# Altium PCB MotorControllerPCB.PcbDoc
Units mm, origin at the board's own origin, x right, y up, seen from the top; angles counter-clockwise.
Board outline 50 x 50 mm, 4 copper layers (L1 [Signal], L2 [GND], L3 [GND], L4 [Signal]), stack 1.57 mm thick; 80 components, 55 nets, 328 pads, 241 vias.
Unrouted connection lines stored in the file: 177.
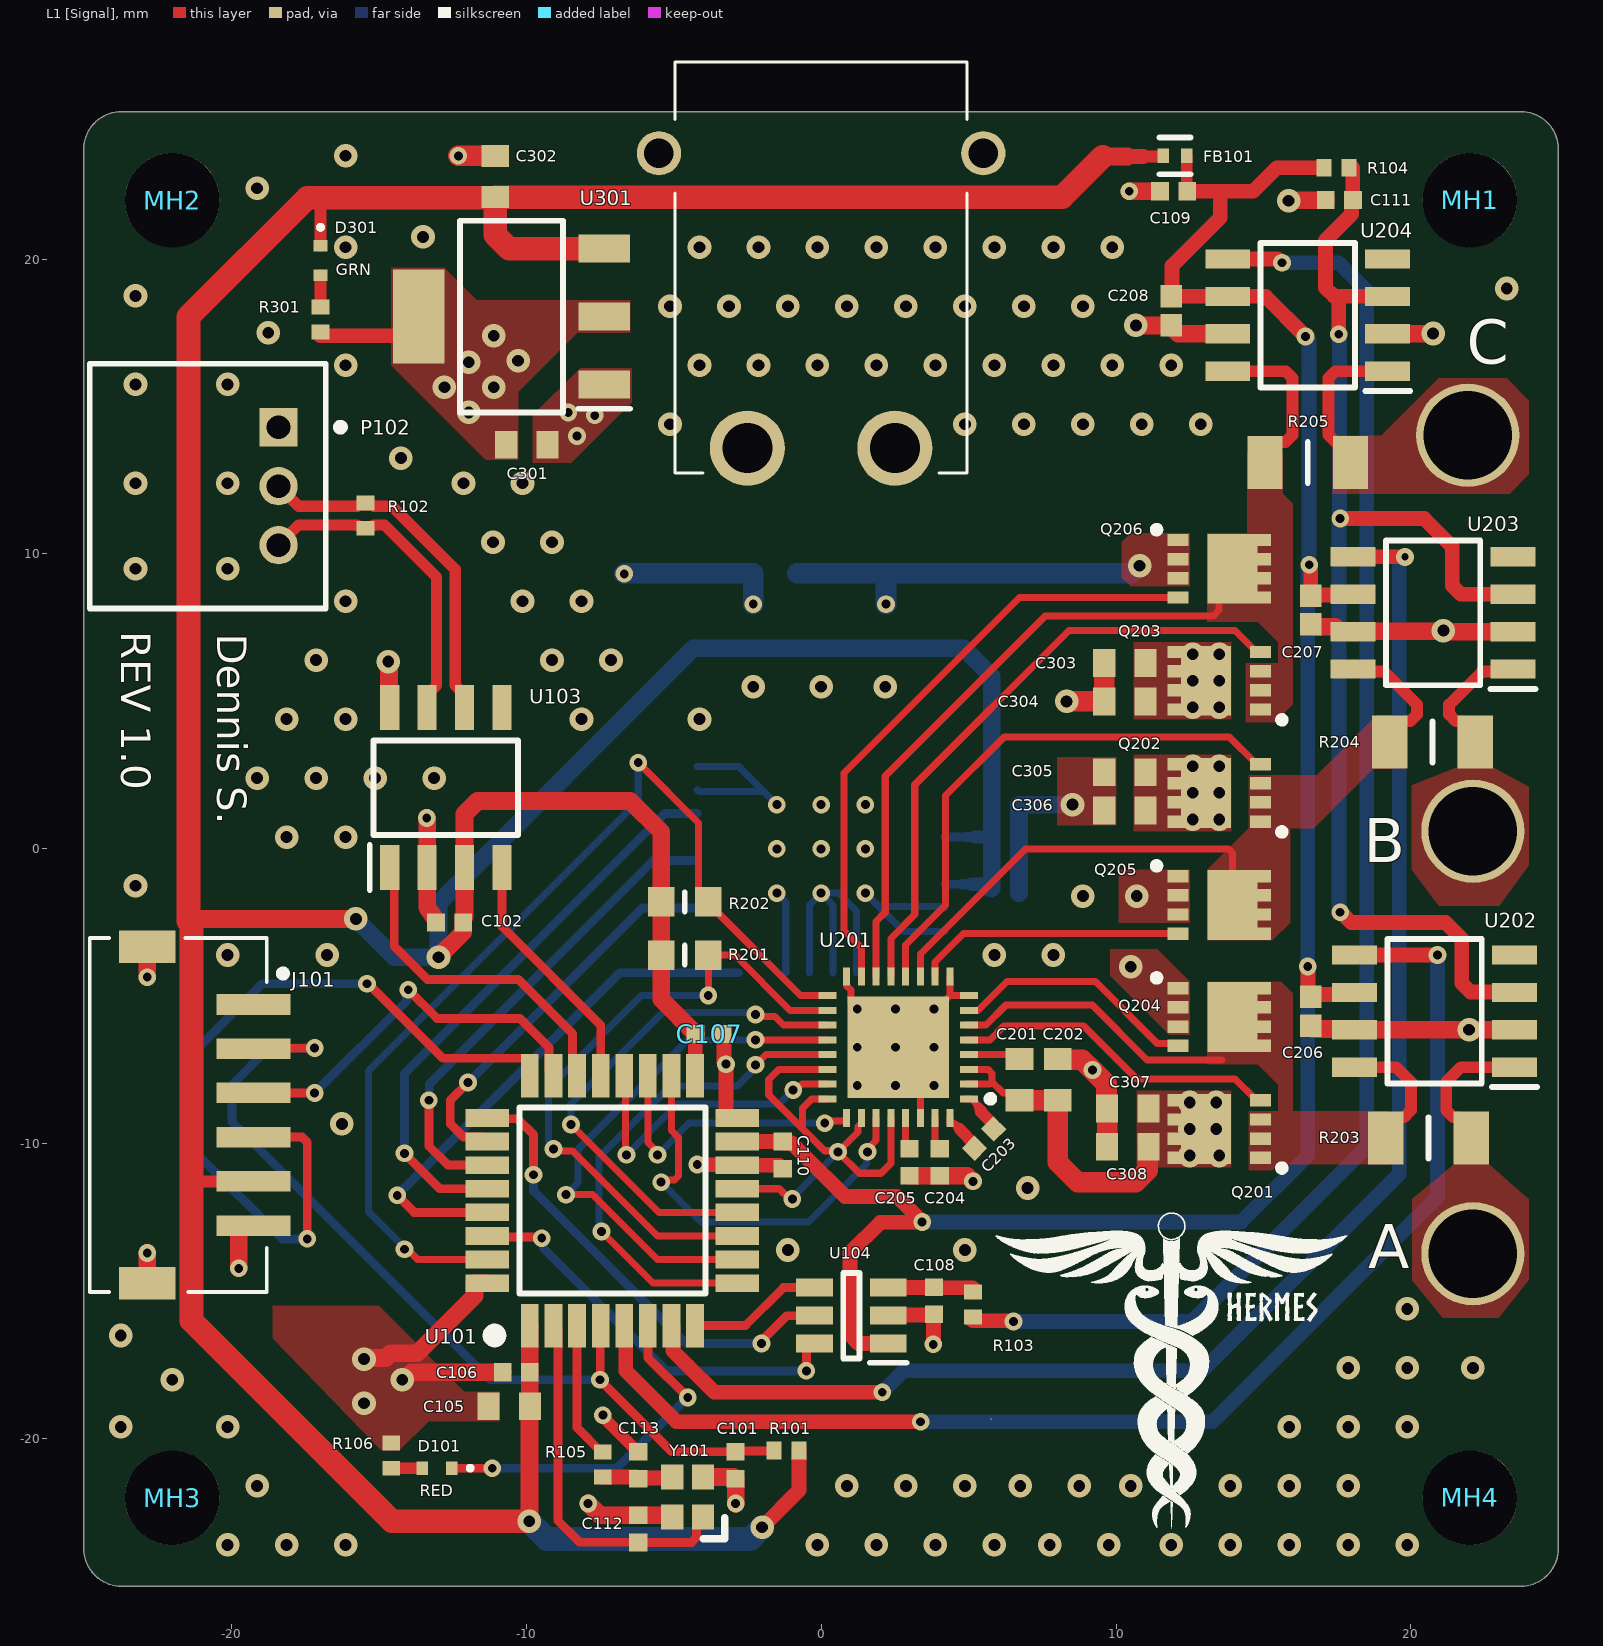
[diagram p0: L1 [Signal] view]
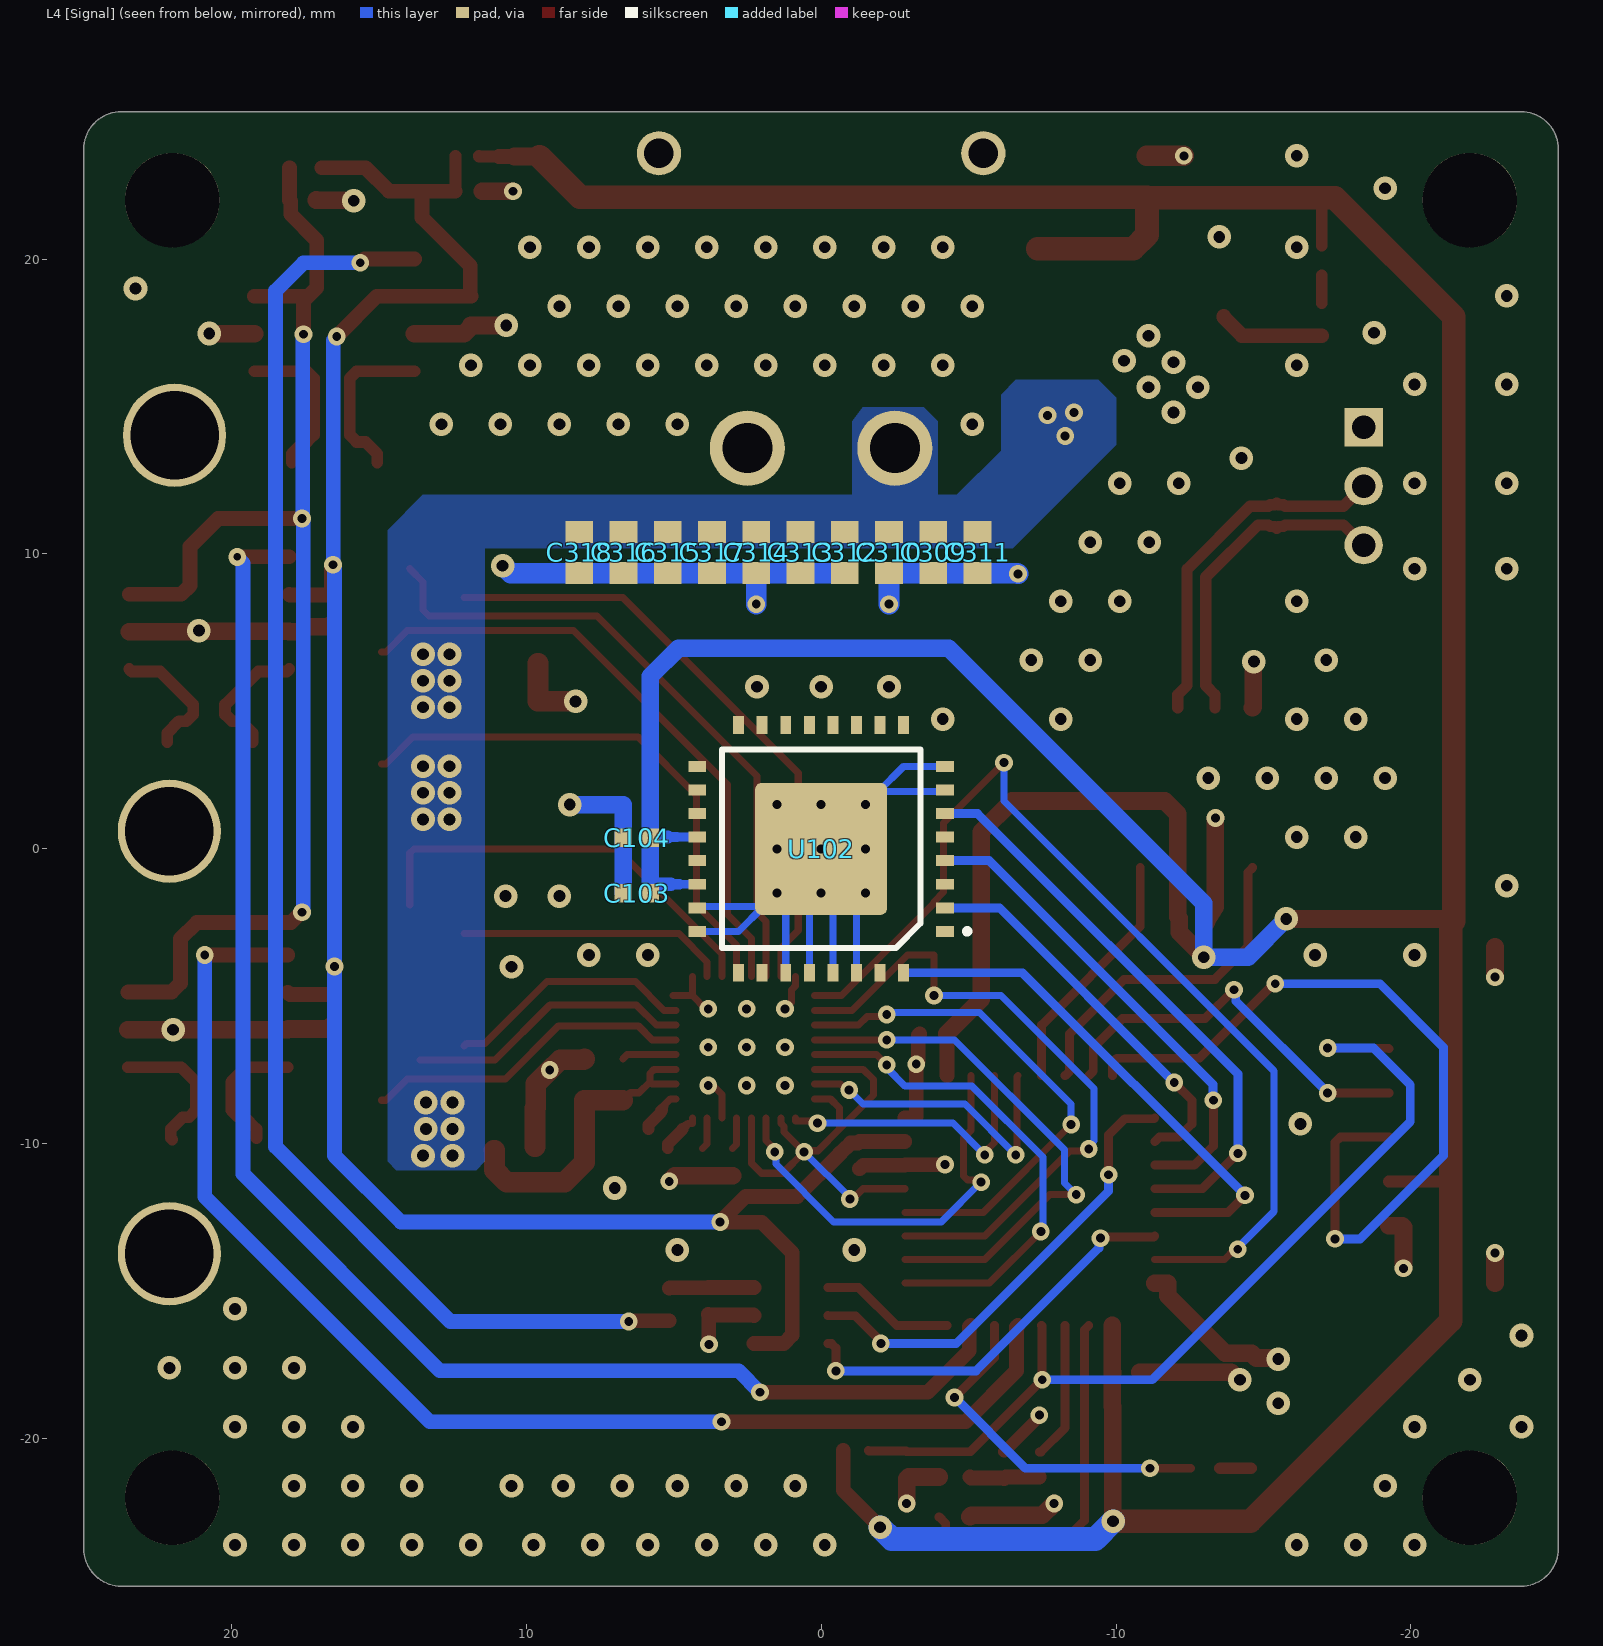
[diagram p1: L4 [Signal] view, seen from below]
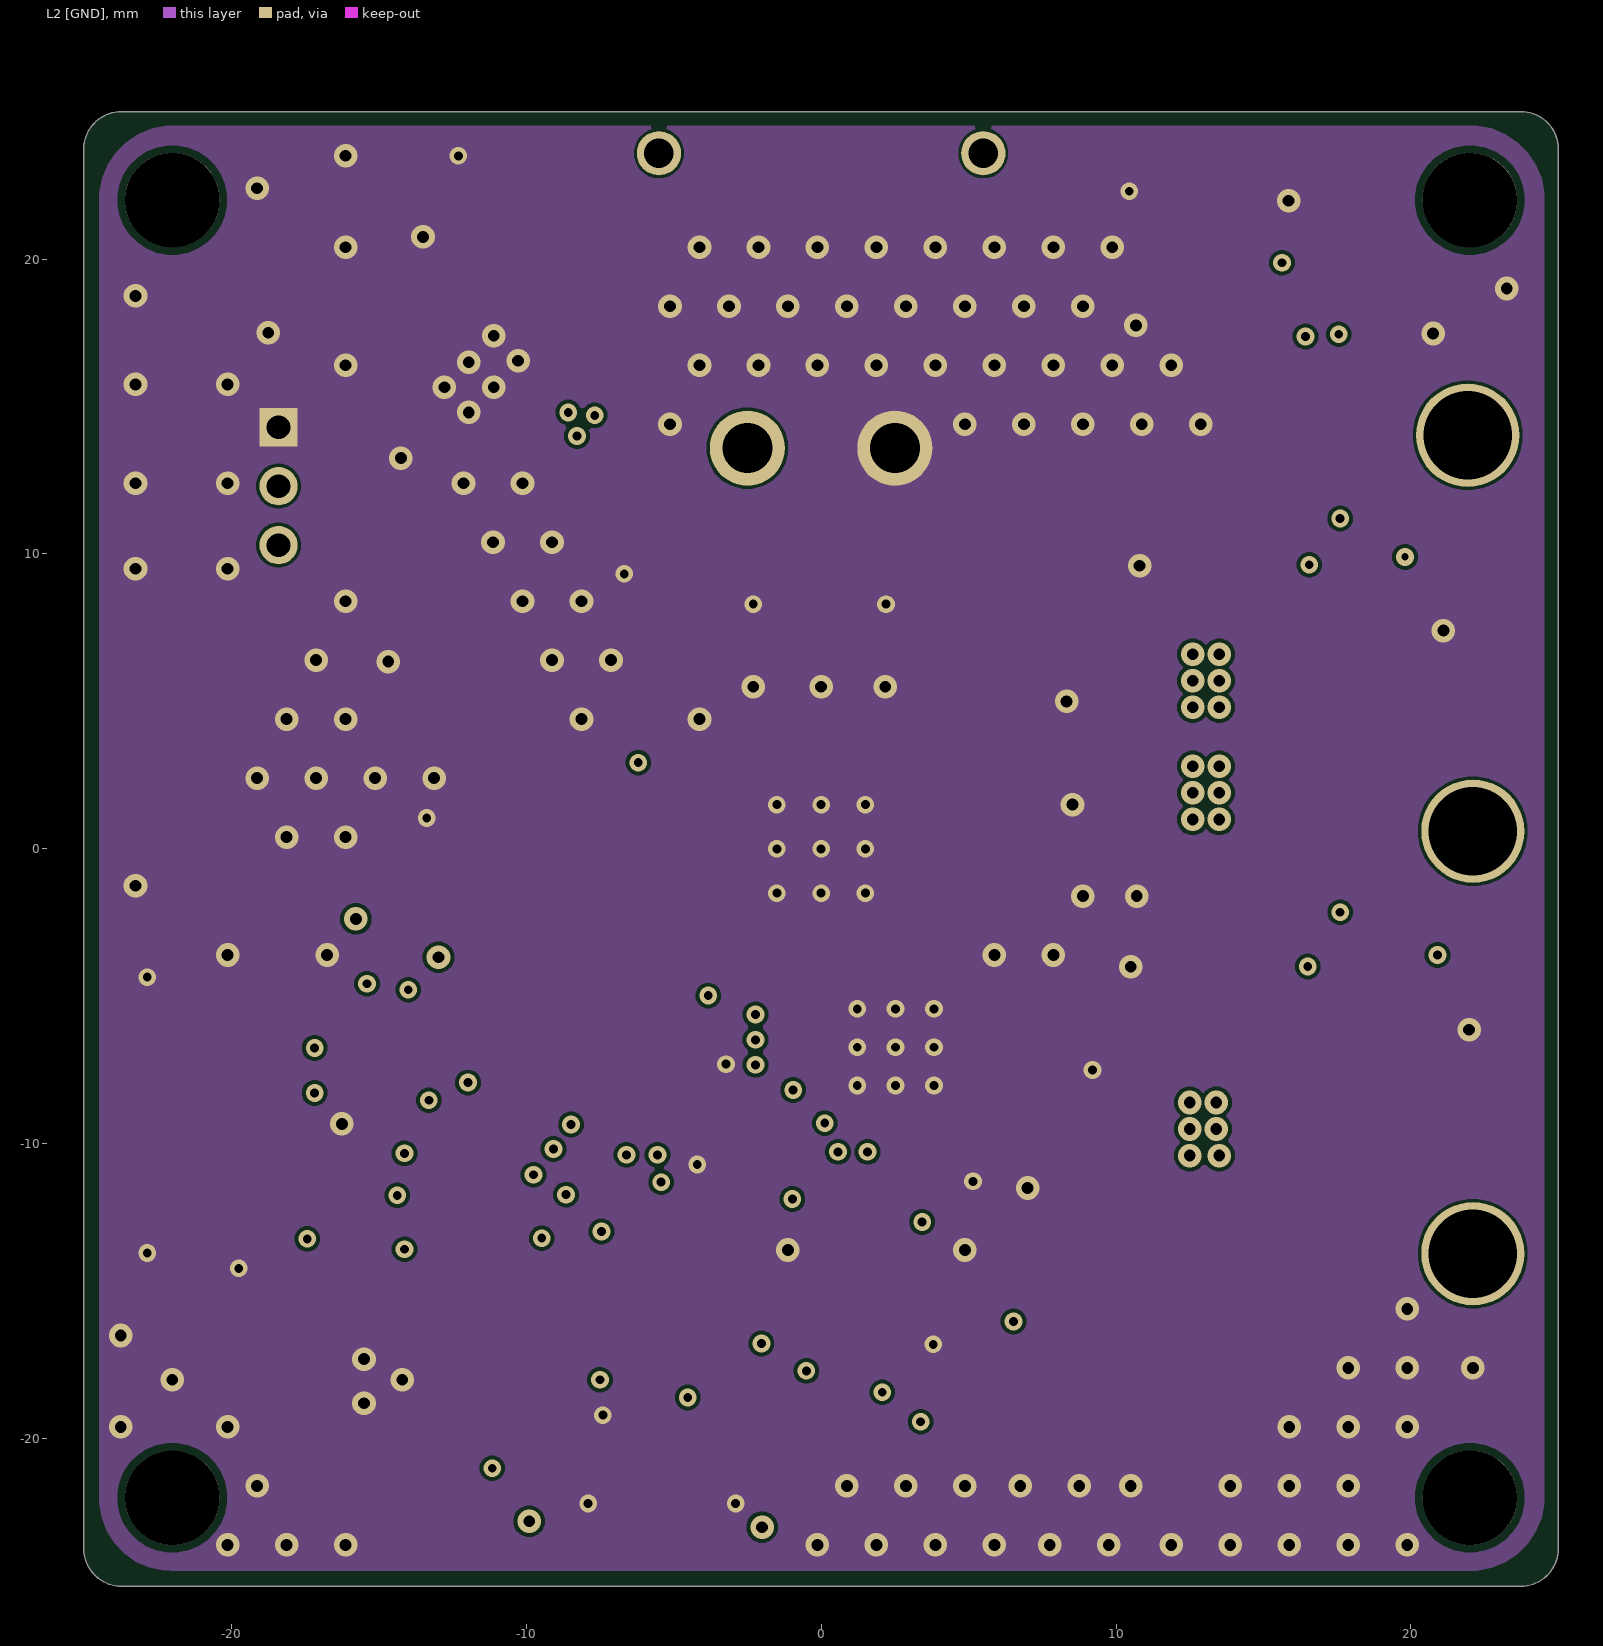
[diagram p2: L2 [GND]]
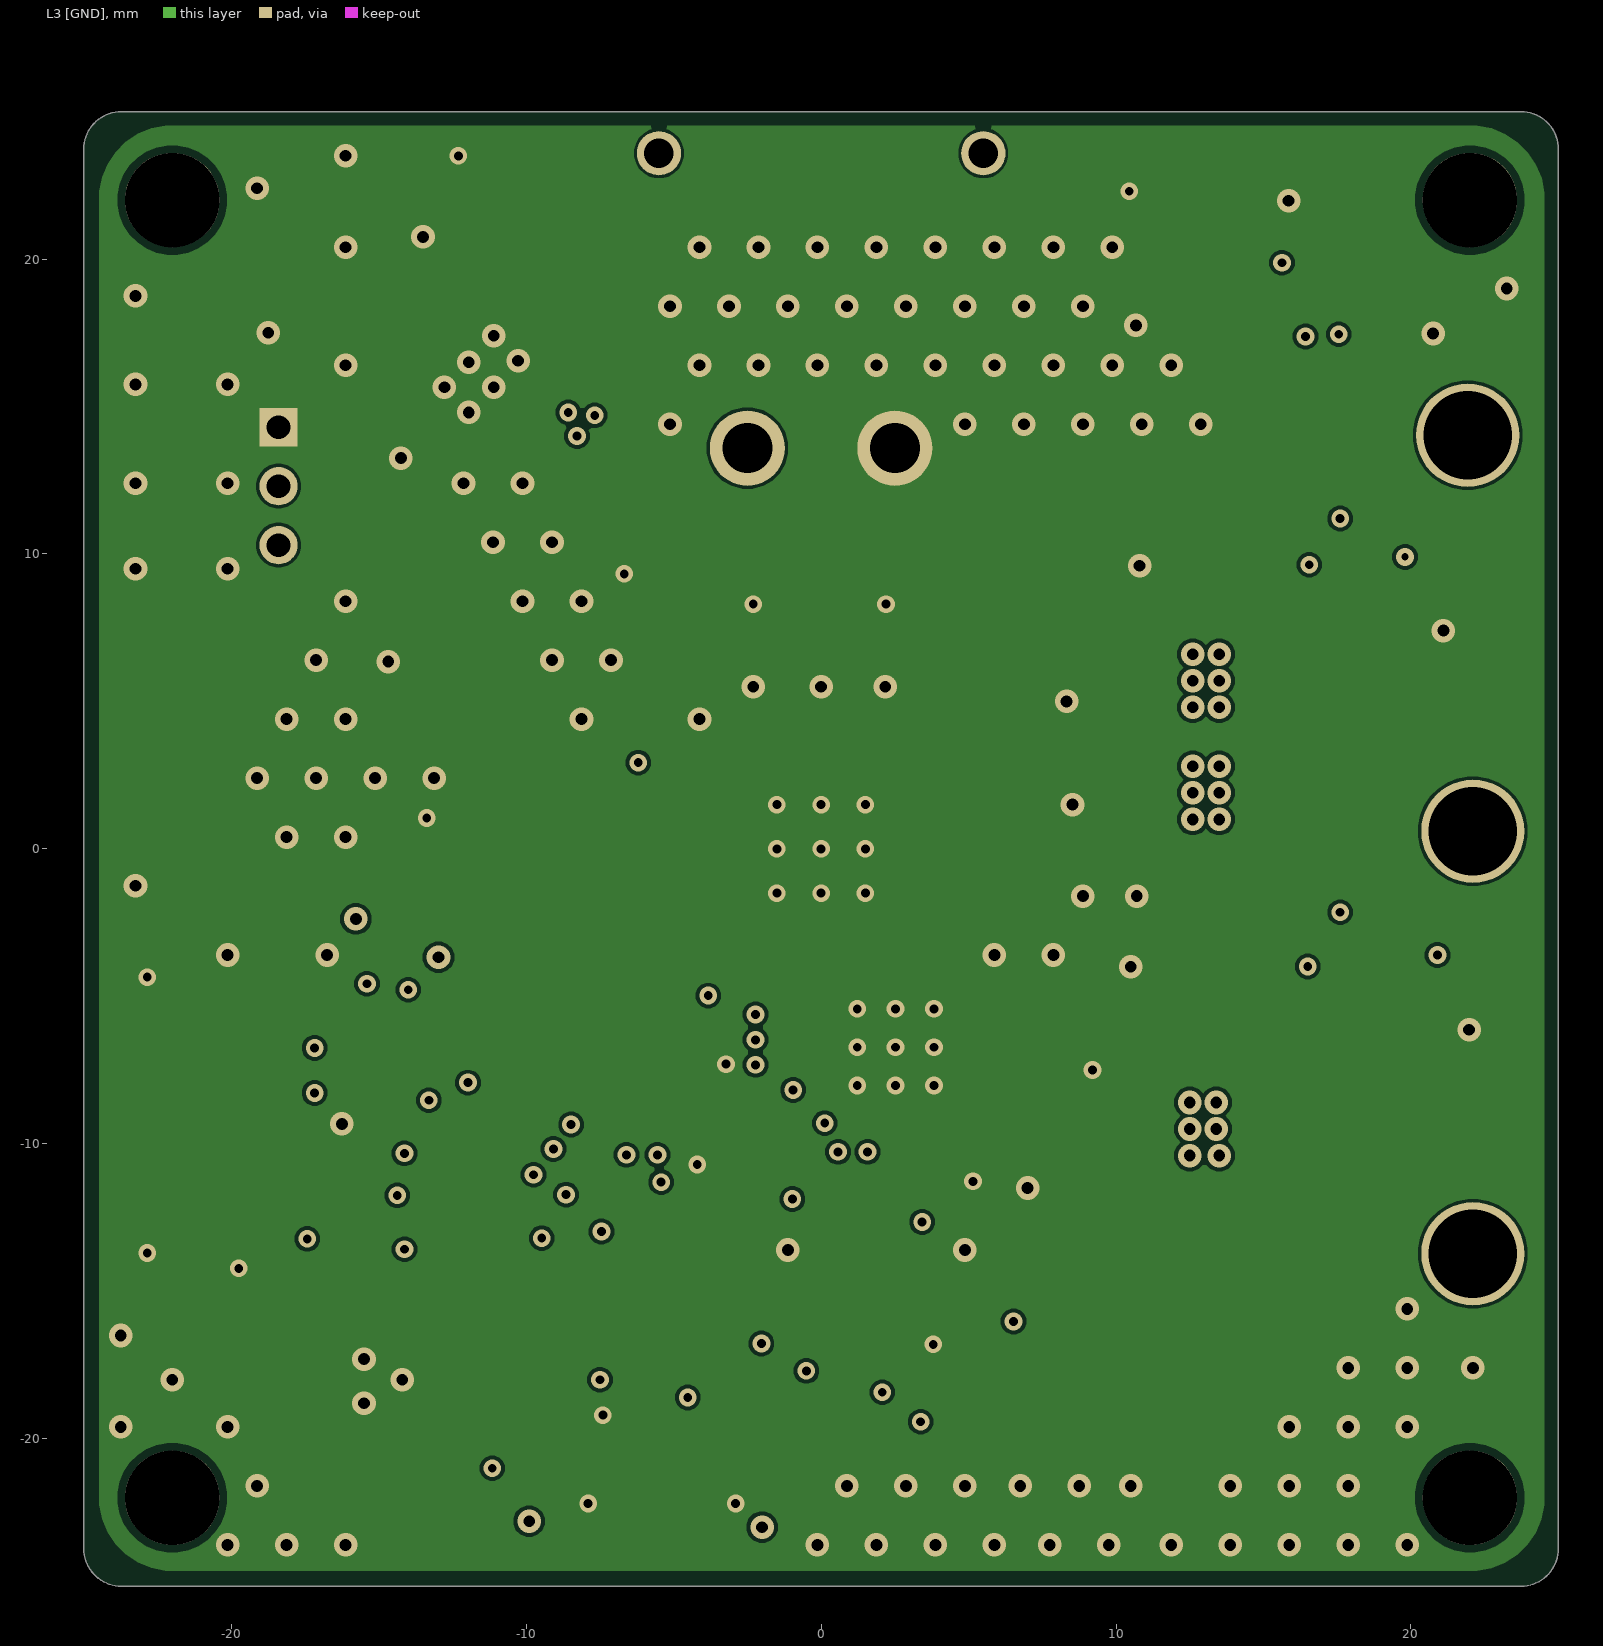
[diagram p3: L3 [GND]]
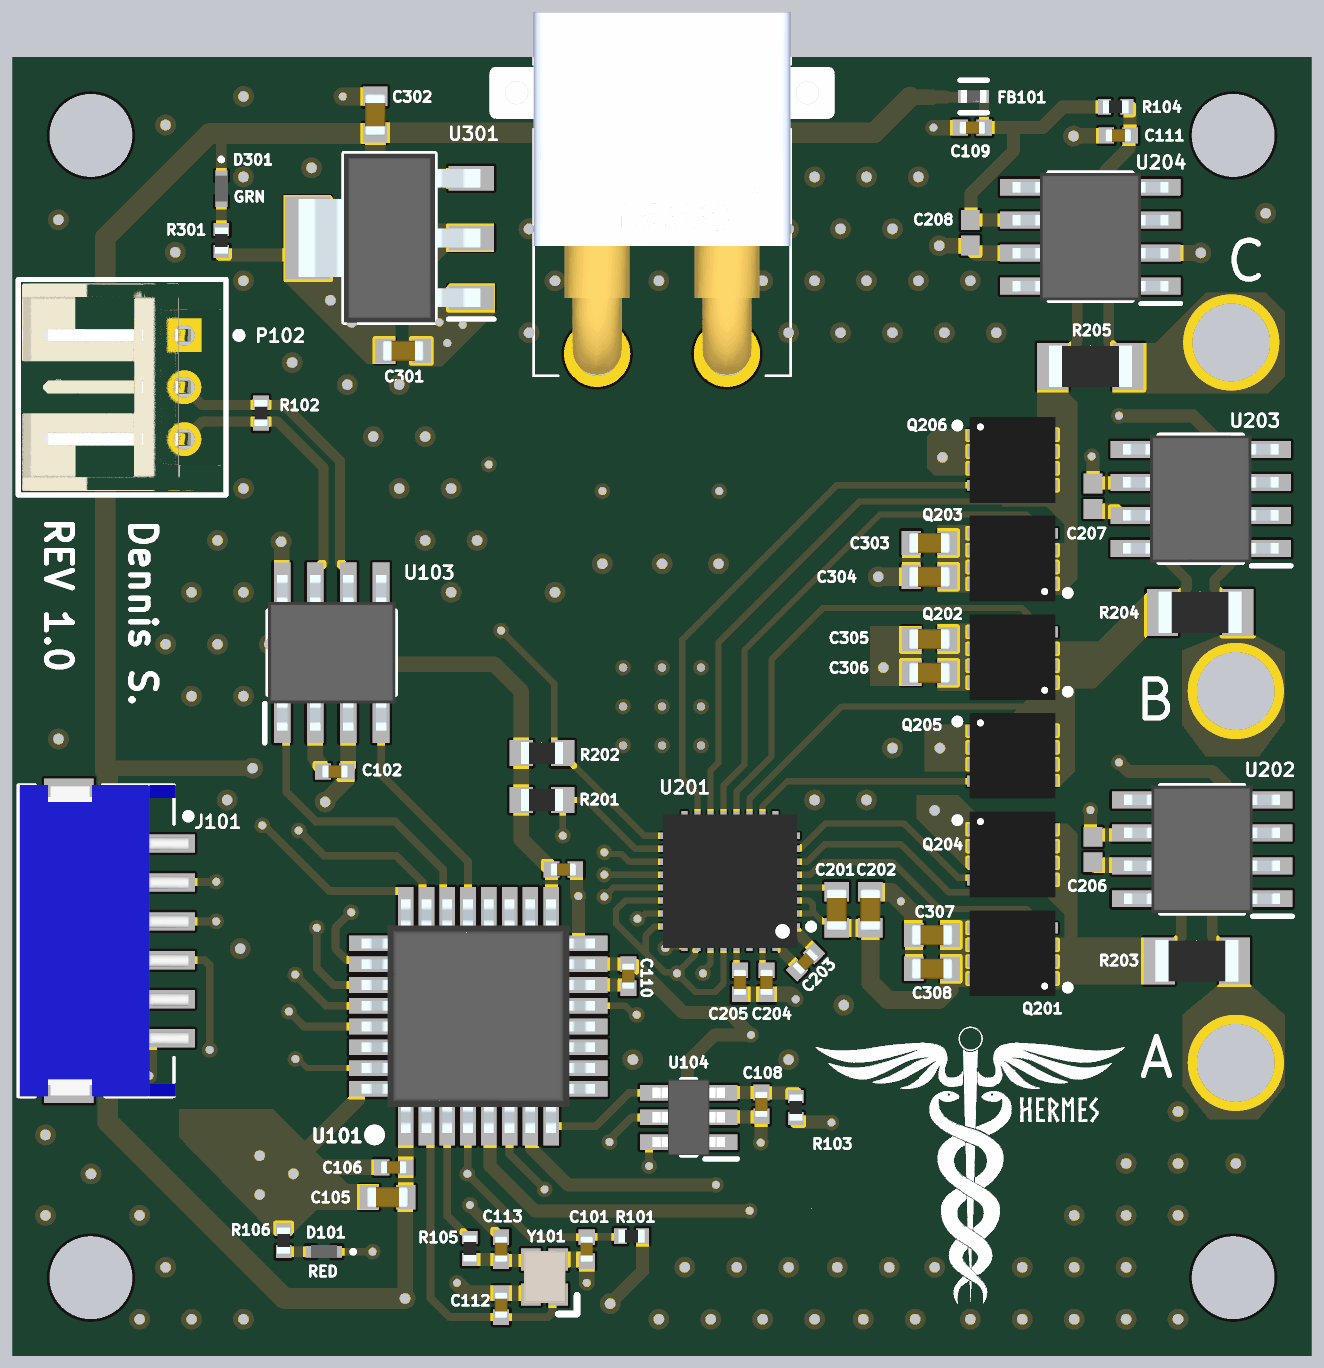
[diagram p4: 3D render of the assembled board from above, using the file's embedded part models]
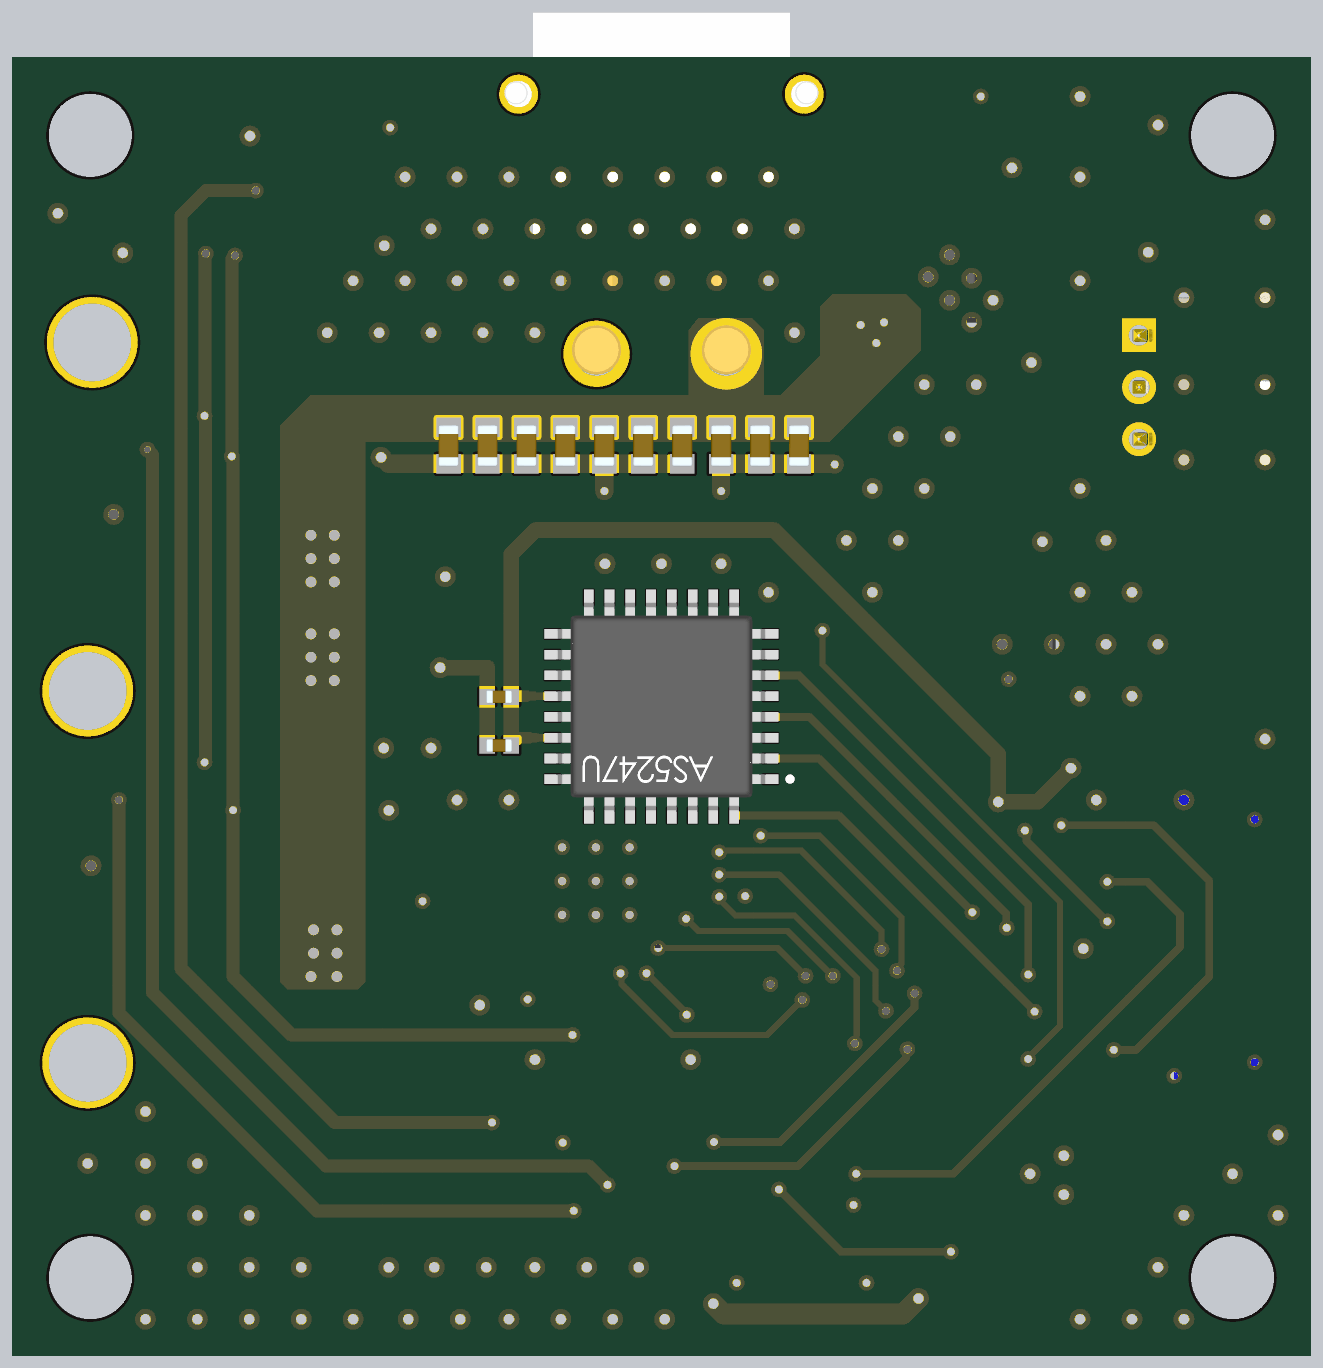
[diagram p5: 3D render of the assembled board from below, using the file's embedded part models]

## Layer stack, top to bottom
Top Solder: solder mask 0.0254, SM-001, Dk 4
L1 [Signal]: signal copper 0.035
Dielectric 1: prepreg 0.2, PP-017, Dk 4.6
L2 [GND]: signal copper 0.0175
Dielectric 3: core 1.065, Core-039, Dk 4.6
L3 [GND]: signal copper 0.0175
Dielectric 5: prepreg 0.2, PP-017, Dk 4.6
L4 [Signal]: signal copper 0.035
Bottom Solder: solder mask 0.0254, SM-001, Dk 4

## Board outline
-25,-23.73 ccw(c-23.73,-23.73) -23.73,-25 23.73,-25 ccw(c23.73,-23.73) 25,-23.73 25,23.73 ccw(c23.73,23.73) 23.73,25 -23.73,25 ccw(c-23.73,23.73) -25,23.73

## Design rules (kind name [scope] priority, off if disabled: settings)
Clearance [All] p1: gap=0.102 ignorepadtopadclearanceinfootprint=FALSE except(0.127: Arc-Via Track-Via SMDPad-Via THPad-Via Via-Via Via-Fill Via-Poly Via-Region Via-Text; 0.25: Arc-Hole Track-Hole SMDPad-Hole THPad-Hole Via-Hole Fill-Hole Poly-Hole Region-Hole Text-Hole)
DiffPairsRouting [All] p1: maxlimit=0.254 minlimit=0.254 mostfreqgap=0.254 toplayer_minwidth=0.381 toplayer_maxwidth=0.381 toplayer_prefwidth=0.381 midlayer1_minwidth=0.381 midlayer1_maxwidth=0.381 midlayer1_prefwidth=0.381 midlayer2_minwidth=0.381 midlayer2_maxwidth=0.381 midlayer2_prefwidth=0.381 bottomlayer_minwidth=0.381 bottomlayer_maxwidth=0.381 bottomlayer_prefwidth=0.381 maxuncoupledlength=12.7
HoleSize [All] p1: absolutevalues=TRUE maxlimit=6.3 minlimit=0.2 maxpercent=80.000 minpercent=20.000
HoleToHoleClearance [All] p1: gap=0.15 allowstackedmicrovias=TRUE
MinimumAnnularRing [All] p1: minimumring=0.15
MinimumSolderMaskSliver [All] p1: minsoldermaskwidth=0.1
PolygonConnect [All] p1: connectstyle=Direct reliefconductorwidth=0.254 reliefentries=4 polygonreliefangle="90 Angle" airgapwidth=0.254
RoutingVias [All] p1: holewidth=0.3 width=0.6 viastyle="Through Hole" minholewidth=0.15 minwidth=0.55 maxholewidth=0.4 maxwidth=0.9
SilkToSilkClearance [All] p1: silktosilkclearance=0.1
SilkToSolderMaskClearance [IsPad] p1: minsilkscreentomaskgap=0.1 clearancetoexposedcopper=TRUE
SolderMaskExpansion [All] p1: expansion=0.102 istentingtop=FALSE
SolderMaskExpansion SolderMaskExpansion_Vias [IsVia] p2: expansion=0.102 istentingtop=TRUE
Width [All] p1: maxlimit=1816.048 minlimit=0.102 preferedwidth=0.102
24 further rules are at their usual default settings.

## Classes and differential pairs
component class Power: C301 C302 C303 C304 C305 C306 C307 C308 C309 C310 C311 C312 C313 C314 C315 C316 C317 C318 D301 MH1 MH2 MH3 MH4 R301 U301
component class "Microcontroller Schematic": .4 C101 C102 C103 C104 C105 C106 C107 C108 C109 C110 C111 C112 C113 D101 FB101 J101 P102 R101 R102 R103 R104 R105 R106 U101 U102 U103 U104 Y101
component class "DRV8350R Schematic": A B C C201 C202 C203 C204 C205 C206 C207 C208 Q201 Q202 Q203 Q204 Q205 Q206 R201 R202 R203 R204 R205 U201 U202 U203 U204
differential pair CAN: +CAN_P -CAN_N

## Components (designator, comment, footprint, x,y, rotation, side; value= is the part's Value field where it differs from the comment)
A "PHASE_A" PAD_HOLE 22.1,-13.725 r0 top
B "PHASE_B" PAD_HOLE 22.1,0.6 r90 top
C "PHASE_C" PAD_HOLE 21.925,14.025 r180 top
C101 "100n" CAPC1005X55N -2.9,-20.9 r270 top
C102 "100n" CAPC1005X55N -12.6,-2.5 r0 top
C103 "100n" CAPC1005X55N 6.25,-1.5 r180 bottom
C104 "100n" CAPC1005X55N 6.25,0.375 r180 bottom
C105 "4u7" CAPC1608X90N -10.575,-18.9 r180 top
C106 "100n" CAPC1005X55N -10.34,-17.75 r0 top
C107 "100n" CAPC1005X55N -3.8,-6.275 r180 top
C108 "470p" CAPC1005X55N 3.825,-15.325 r90 top
C109 "1u" CAPC1005X55N 11.95,22.3 r0 top
C110 "100n" CAPC1005X55N -1.3,-10.385 r90 top
C111 "1u" CAPC1005X55N 17.575,22 r0 top
C112 "10p" CAPC1005X55N -6.2,-23.06 r270 top
C113 "10p" CAPC1005X55N -6.2,-20.9 r270 top
C201 "10uF" CAPC1608X90N 6.725,-7.825 r90 top
C202 "100n" CAPC1608X90N 8.025,-7.825 r270 top
C203 "47n" CAPC1005X55N 5.525,-9.825 r45 top
C204 "1u" CAPC1005X55N 4.025,-10.625 r270 top
C205 "1u" CAPC1005X55N 3,-10.625 r90 top
C206 "100n" CAPC1050X55X23ML05T13 16.6,-5.51 r90 top
C207 "100n" CAPC1050X55X23ML05T13 16.6,8.1 r90 top
C208 "100n" CAPC1050X55X23ML05T13 11.875,18.25 r90 top
C301 "2u2" CAPC1608X90N -9.975,13.7 r0 top
C302 "2u2" CAPC1608X90N -11.05,22.8 r270 top
C303 "10u" CAPC1608X90N 10.3,6.3 r0 top
C304 "10u" CAPC1608X90N 10.3,5 r0 top
C305 "10u" CAPC1608X90N 10.3,2.6 r0 top
C306 "10u" CAPC1608X90N 10.3,1.3 r0 top
C307 "10u" CAPC1608X90N 10.4,-8.8 r0 top
C308 "10u" CAPC1608X90N 10.4,-10.1 r0 top
C309 "10u" CAPC1608X90N -3.8,10.05 r90 bottom
C310 "10u" CAPC1608X90N -2.3,10.05 r90 bottom
C311 "10u" CAPC1608X90N -5.3,10.05 r90 bottom
C312 "10u" CAPC1608X90N -0.8,10.05 r90 bottom
C313 "10u" CAPC1608X90N 0.7,10.05 r90 bottom
C314 "10u" CAPC1608X90N 2.2,10.05 r90 bottom
C315 "10u" CAPC1608X90N 5.2,10.05 r90 bottom
C316 "10u" CAPC1608X90N 6.7,10.05 r90 bottom
C317 "10u" CAPC1608X90N 3.7,10.05 r90 bottom
C318 "10u" CAPC1608X90N 8.2,10.05 r90 bottom
D101 "RED" 150040GS73220 -13.025,-21 r180 top
D301 "GRN" 150040GS73220 -16.975,19.95 r270 top
FB101 "BLM15AG121SN1D" FP-BLM15-0_05-MFG 12,23.5 r0 top
J101 "JST-6" JST_S6B-ZR-SM4A-TF(LF)(SN) -19.25,-9.025 r270 top
MH1 "MH" MH 22,22 r0 top
MH2 "MH" MH -22,22 r0 top
MH3 "MH" MH -22,-22 r0 top
MH4 "MH" MH 22,-22 r0 top
P102 "440055-3" FP-440055-3-MFG -20.798,12.3 r90 top
Q201 "NTTFS3D7N06HLTWG" PQFN-8 13.5,-9.5 r90 top
Q202 "NTTFS3D7N06HLTWG" PQFN-8 13.5,1.9 r90 top
Q203 "NTTFS3D7N06HLTWG" PQFN-8 13.5,5.7 r90 top
Q204 "NTTFS3D7N06HLTWG" PQFN-8 13.5,-5.7 r270 top
Q205 "NTTFS3D7N06HLTWG" PQFN-8 13.5,-1.9 r270 top
Q206 "NTTFS3D7N06HLTWG" PQFN-8 13.5,9.5 r270 top
R101 "120" RESC1005X40N -1.175,-20.4 r180 top
R102 "120" RESC1005X40N -15.45,11.3 r270 top
R103 "22" RESC1005X40N 5.15,-15.45 r90 top
R104 "47" RESC1005X40N 17.475,23.1 r0 top
R105 "0" RESC1005X40N -7.4,-20.875 r270 top
R106 "1k" RESC1005X40N -14.575,-20.575 r90 top
R201 "2k2" RESC1608X55N -4.625,-3.6 r180 top
R202 "2k2" RESC1608X55N -4.625,-1.796 r180 top
R203 "5m" RESC3216X80N 20.6,-9.8 r0 top
R204 "5m" RESC3216X80N 20.725,3.625 r0 top
R205 "5m" RESC3216X80N 16.5,13.1 r0 top
R301 "1k" RESC1005X40N -16.975,17.95 r270 top
U101 "STM32G431K6T6" QFP80P900X900X160-32N -7.075,-11.925 r90 top
U102 "AS5247U" QFN-N32-THM 0,0 r0 bottom
U103 "TCAN337GDR" SOIC127P600X175-8N -12.725,2.075 r90 top
U104 "ADC121C021CIMK_NOPB" SOT95P280X110-6N 1.025,-15.825 r180 top
U201 "DRV8350FSRTVR" WQFN-N32-THM 2.615,-6.725 r180 top
U202 "INA240A4EDRQ1" SOIC127P600X175-8N 20.8,-5.5 r180 top
U203 "INA240A4EDRQ1" SOIC127P600X175-8N 20.75,8 r180 top
U204 "INA240A4EDRQ1" SOIC127P600X175-8N 16.5,18.1 r180 top
U301 "MCP1792-3302H_DB" SOT230P700X180-4N -10.5,18.05 r180 top
Y101 "ECX-1637" ECX-1637 -4.525,-21.975 r90 top
? "XT30PW-M" XT30PWM 0,19.5 r0 top

## Footprints (in the part's own frame and the unit in brackets; to place one, negate y for a bottom-side part, rotate by r counter-clockwise, add the part's x,y. Pads: shape width x height; smd on the part's side, far side on the other; paste and mask are expansions set on the pad)
150040GS73220 [mm]
  rect 0.4x0.46 smd: 1(-0.5,0) 2(0.5,0)
  silkscreen extent -1.17,-0.05 -1.07,0.05, body extent -0.5,-0.25 0.5,0.25, height 0.45
CAPC1005X55N [mm]
  rect 0.6x0.62 smd: 1(-0.46,0) 2(0.46,0)
  body extent -0.5,-0.25 0.5,0.25, height 0.55
CAPC1050X55X23ML05T13 [mm] "Chip Capacitor, 2-Leads, Body 1.05x0.55mm, IPC Low Density"
  rect 0.76x0.72 smd: 1(-0.49,0) 2(0.49,0)
  body extent -0.53,-0.28 0.53,0.27, height 0.55
CAPC1608X90N [mm]
  rect 0.75x0.94 smd: 1(-0.7,0) 2(0.7,0)
  body extent -0.8,-0.4 0.8,0.4, height 0.9
ECX-1637 [mm]
  rect 0.85x0.75 smd: 1(-0.675,-0.525) 2(0.675,-0.525) 3(0.675,0.525) 4(-0.675,0.525)
  silkscreen extent -1.43,-1.25 -0.7,-0.53, body extent -1,-0.8 1,0.8, height 0.45
FP-440055-3-MFG [mm]
  rect 1.3x1.3 hole 0.8 paste-1000 mask+0: 1(2,-2.4)
  round 1.3 hole 0.8 paste-1000 mask+0: 2(0,-2.4) 3(-2,-2.4)
  silkscreen extent -4.15,-4.63 4.15,4, body extent -4.25,-4.1 4.25,4.1, height 0.25
FP-BLM15-0_05-MFG [mm]
  rect 0.4x0.5 smd paste+0 mask+0: 1(-0.4,0) 2(0.4,0)
  silkscreen extent -0.53,-0.63 0.52,0.63, body extent -0.7,-0.38 0.7,0.38, height 0.25
JST_S6B-ZR-SM4A-TF(LF)(SN) [mm]
  rect 0.7x2.5 smd: 1(-3.75,0) 2(-2.25,0) 3(-0.75,0) 4(0.75,0) 5(2.25,0) 6(3.75,0)
  rect 1.1x1.9 smd: SH1(-5.7,-3.6) SH2(5.7,-3.6)
  silkscreen extent -6,-5.55 6,1.12, body extent -6,-5.5 6,1, height 3.7
MH [mm]
  round 3.2 hole 3.2 unplated: MH(0,0)
PAD_HOLE [mm]
  round 3.5 hole 3: 1(0,0)
PQFN-8 [mm]
  rect 0.42x0.7 smd mask+0.07: 1(-0.975,-1.4) 1(-0.325,-1.4) 1(0.325,-1.4) 2(0.975,-1.4)
  rect 0.42x0.45 smd mask+0.07: 3(-0.975,1.525) 3(-0.325,1.525) 3(0.325,1.525) 3(0.975,1.525)
  rect 2.37x1.7 smd mask+0.07: 3(0,0.45)
  silkscreen extent -1.42,-2.22 -1.23,-2.03, body extent -1.65,-1.65 1.65,1.65, height 0.75
QFN-N32-THM [mm]
  rect 0.6x0.37 smd mask+0.05: 1(-4.2,2.8) 2(-4.2,2) 3(-4.2,1.2) 4(-4.2,0.4) 5(-4.2,-0.4) 6(-4.2,-1.2) 7(-4.2,-2) 8(-4.2,-2.8) 17(4.2,-2.8) 18(4.2,-2) 19(4.2,-1.2) 20(4.2,-0.4) 21(4.2,0.4) 22(4.2,1.2) 23(4.2,2) 24(4.2,2.8)
  rect 0.37x0.6 smd mask+0.05: 9(-2.8,-4.2) 10(-2,-4.2) 11(-1.2,-4.2) 12(-0.4,-4.2) 13(0.4,-4.2) 14(1.2,-4.2) 15(2,-4.2) 16(2.8,-4.2) 25(2.8,4.2) 26(2,4.2) 27(1.2,4.2) 28(0.4,4.2) 29(-0.4,4.2) 30(-1.2,4.2) 31(-2,4.2) 32(-2.8,4.2)
  rrect10% 4.48x4.48 smd mask+0.05: 33(0,0)
  silkscreen extent -5,-3.37 3.37,3.37, body extent -4.51,-4.51 4.51,4.51, height 1.32
QFP80P900X900X160-32N [mm]
  rect 1.475x0.6 smd: 1(-4.238,2.8) 2(-4.238,2) 3(-4.238,1.2) 4(-4.238,0.4) 5(-4.238,-0.4) 6(-4.238,-1.2) 7(-4.238,-2) 8(-4.238,-2.8) 17(4.238,-2.8) 18(4.238,-2) 19(4.238,-1.2) 20(4.238,-0.4) 21(4.238,0.4) 22(4.238,1.2) 23(4.238,2) 24(4.238,2.8)
  rect 0.6x1.475 smd: 9(-2.8,-4.238) 10(-2,-4.238) 11(-1.2,-4.238) 12(-0.4,-4.238) 13(0.4,-4.238) 14(1.2,-4.238) 15(2,-4.238) 16(2.8,-4.238) 25(2.8,4.238) 26(2,4.238) 27(1.2,4.238) 28(0.4,4.238) 29(-0.4,4.238) 30(-1.2,4.238) 31(-2,4.238) 32(-2.8,4.238)
  silkscreen extent -4.77,-3.15 3.15,4.2, body extent -4.5,-4.5 4.5,4.5, height 1.6
RESC1005X40N [mm]
  rect 0.5x0.6 smd: 1(-0.425,0) 2(0.425,0)
  body extent -0.5,-0.25 0.5,0.25, height 0.4
RESC1608X55N [mm]
  rect 0.9x1 smd: 1(-0.8,0) 2(0.8,0)
  silkscreen extent 0,-0.33 0,0.33, body extent -0.8,-0.43 0.8,0.43, height 0.55
RESC3216X80N [mm]
  rect 1.2x1.8 smd: 1(-1.45,0) 2(1.45,0)
  silkscreen extent 0,-0.7 0,0.7, body extent -1.6,-0.8 1.6,0.8, height 0.8
SOIC127P600X175-8N [mm]
  rect 1.525x0.65 smd: 1(-2.712,1.905) 2(-2.712,0.635) 3(-2.712,-0.635) 4(-2.712,-1.905) 5(2.712,-1.905) 6(2.712,-0.635) 7(2.712,0.635) 8(2.712,1.905)
  silkscreen extent -3.47,-2.45 1.6,2.58, body extent -3,-2.45 3,2.45, height 1.75
SOT95P280X110-6N [mm]
  rect 1.25x0.6 smd: 1(-1.25,0.95) 2(-1.25,0) 3(-1.25,-0.95) 4(1.25,-0.95) 5(1.25,0) 6(1.25,0.95)
  silkscreen extent -1.88,-1.45 0.28,1.6, body extent -1.4,-1.45 1.4,1.45, height 0.97
SOT230P700X180-4N [mm]
  rect 1.75x0.95 smd: 1(-3.15,2.3) 2(-3.15,0) 3(-3.15,-2.3)
  rect 1.75x3.2 smd: 4(3.15,0)
  silkscreen extent -4.03,-3.25 1.75,3.25, body extent -3.5,-3.25 3.5,3.25, height 1.8
WQFN-N32-THM [mm]
  rect 0.6x0.24 smd mask+0.075: 1(-2.4,1.75) 2(-2.4,1.25) 3(-2.4,0.75) 4(-2.4,0.25) 5(-2.4,-0.25) 6(-2.4,-0.75) 7(-2.4,-1.25) 8(-2.4,-1.75) 17(2.4,-1.75) 18(2.4,-1.25) 19(2.4,-0.75) 20(2.4,-0.25) 21(2.4,0.25) 22(2.4,0.75) 23(2.4,1.25) 24(2.4,1.75)
  rect 0.24x0.6 smd mask+0.075: 9(-1.75,-2.4) 10(-1.25,-2.4) 11(-0.75,-2.4) 12(-0.25,-2.4) 13(0.25,-2.4) 14(0.75,-2.4) 15(1.25,-2.4) 16(1.75,-2.4) 25(1.75,2.4) 26(1.25,2.4) 27(0.75,2.4) 28(0.25,2.4) 29(-0.25,2.4) 30(-0.75,2.4) 31(-1.25,2.4) 32(-1.75,2.4)
  rect 3.45x3.45 smd: 33(0,0)
  silkscreen extent -3.23,1.65 -3.02,1.85, body extent -2.58,-2.58 2.58,2.58, height 0.8
XT30PWM [mm]
  round 2.55 hole 1.7: 1(-2.5,-5.912) 2(2.5,-5.912)
  round 1.5 hole 1: 3(5.5,4.088) 4(-5.5,4.088)
  silkscreen extent -4.95,-6.76 4.95,7.19, body extent -6.65,-6.71 6.65,7.24, height 5.06

## Part data
A B C: library part 3MM_PAD
C101 C102 C103 C104 C106 C107 C108 C109 C110 C111 C112 C113: library part CAP_0402_16V, "Capacitor", Arrow Part Number=CL05B104KO5NNNC, Manufacturer_Name="Samsung Electro-Mechanics", Mouser Part Number=187-CL05B104KO5NNNC, Arrow Price/Stock=https://www.arrow.com/en/products/cl05b104ko5nnnc/samsung-electro-mechanics, Datasheet Link=https://datasheet.datasheetarchive.com/originals/distributors/Datasheets-DGA10/2408147.pdf, Height=0.55mm, Manufacturer_Part_Number=CL05B104KO5NNNC, Mouser Price/Stock=https://www.mouser.co.uk/ProductDetail/Samsung-Electro-Mechanics/CL05B104KO5NNNC?qs=hqM3L16%252BxlfT2SKOuAUq6Q%3D%3D
C105: library part CAP_0603_16V, "Capacitor", Arrow Part Number=CL05B104KO5NNNC, Manufacturer_Name="Samsung Electro-Mechanics", Mouser Part Number=187-CL05B104KO5NNNC, Arrow Price/Stock=https://www.arrow.com/en/products/cl05b104ko5nnnc/samsung-electro-mechanics, Datasheet Link=https://datasheet.datasheetarchive.com/originals/distributors/Datasheets-DGA10/2408147.pdf, Height=0.55mm, Manufacturer_Part_Number=CL05B104KO5NNNC, Mouser Price/Stock=https://www.mouser.co.uk/ProductDetail/Samsung-Electro-Mechanics/CL05B104KO5NNNC?qs=hqM3L16%252BxlfT2SKOuAUq6Q%3D%3D
C201 C303 C304 C305 C306 C307 C308 C309 C310 C311 C312 C313 C314 C315 C316 C317 C318: library part CAP_0805_50V, "Capacitor", Arrow Part Number=CL05B104KO5NNNC, Manufacturer_Name="Samsung Electro-Mechanics", Mouser Part Number=187-CL05B104KO5NNNC, Arrow Price/Stock=https://www.arrow.com/en/products/cl05b104ko5nnnc/samsung-electro-mechanics, Datasheet Link=https://datasheet.datasheetarchive.com/originals/distributors/Datasheets-DGA10/2408147.pdf, Height=0.55mm, Manufacturer_Part_Number=CL05B104KO5NNNC, Mouser Price/Stock=https://www.mouser.co.uk/ProductDetail/Samsung-Electro-Mechanics/CL05B104KO5NNNC?qs=hqM3L16%252BxlfT2SKOuAUq6Q%3D%3D
C202: library part CAP_0603_100V, "Capacitor", Arrow Part Number=CL05B104KO5NNNC, Manufacturer_Name="Samsung Electro-Mechanics", Mouser Part Number=187-CL05B104KO5NNNC, Arrow Price/Stock=https://www.arrow.com/en/products/cl05b104ko5nnnc/samsung-electro-mechanics, Datasheet Link=https://datasheet.datasheetarchive.com/originals/distributors/Datasheets-DGA10/2408147.pdf, Height=0.55mm, Manufacturer_Part_Number=CL05B104KO5NNNC, Mouser Price/Stock=https://www.mouser.co.uk/ProductDetail/Samsung-Electro-Mechanics/CL05B104KO5NNNC?qs=hqM3L16%252BxlfT2SKOuAUq6Q%3D%3D
C203 C204 C205: library part CAP_0402_50V, "Capacitor", Arrow Part Number=CL05B104KO5NNNC, Manufacturer_Name="Samsung Electro-Mechanics", Mouser Part Number=187-CL05B104KO5NNNC, Arrow Price/Stock=https://www.arrow.com/en/products/cl05b104ko5nnnc/samsung-electro-mechanics, Datasheet Link=https://datasheet.datasheetarchive.com/originals/distributors/Datasheets-DGA10/2408147.pdf, Height=0.55mm, Manufacturer_Part_Number=CL05B104KO5NNNC, Mouser Price/Stock=https://www.mouser.co.uk/ProductDetail/Samsung-Electro-Mechanics/CL05B104KO5NNNC?qs=hqM3L16%252BxlfT2SKOuAUq6Q%3D%3D
C206 C207 C208: library part CMP-2000-05439-1, "Chip Capacitor, 100 nF, +/- 10%, 16 V, -55 to 125 degC, 0402 (1005 Metric), RoHS, Tape and Reel", Capacitance=100000pF, Case Size/Dimension=0402, Dielectric=X7R, Manufacturer="Samsung Electro-Mechanics", Rated Voltage=16V, Tolerance (%)=±10%, Datasheet URL=https://datasheet.ciiva.com/29198/458718-da-01-en-vs-kondensator-0402-29198423.pdf, Datasheet Version=Nov-10, Manufacturer URL=http://www.samsungsem.com/global/index.jsp
C301 C302: library part CAP_0603_50V, "Capacitor", Arrow Part Number=CL05B104KO5NNNC, Manufacturer_Name="Samsung Electro-Mechanics", Mouser Part Number=187-CL05B104KO5NNNC, Arrow Price/Stock=https://www.arrow.com/en/products/cl05b104ko5nnnc/samsung-electro-mechanics, Datasheet Link=https://datasheet.datasheetarchive.com/originals/distributors/Datasheets-DGA10/2408147.pdf, Height=0.55mm, Manufacturer_Part_Number=CL05B104KO5NNNC, Mouser Price/Stock=https://www.mouser.co.uk/ProductDetail/Samsung-Electro-Mechanics/CL05B104KO5NNNC?qs=hqM3L16%252BxlfT2SKOuAUq6Q%3D%3D
D101: library part RED_0402_LED
D301: library part GRN_0402_LED
FB101: library part CMP-0686-00170-4, "Chip Ferrite Bead, 0402, 120Ω @ 100MHz, 0.19Ω, 25%, 550mA", Case Code (Imperial)=0402, Case Code (Metric)=1005, Current Rating=550mA, DC Current=500mA, DC Resistance (DCR)=190mR, Frequency=100MHz, Max Operating Temperature=125°C, Min Operating Temperature=-55°C, Package Quantity=1, Tolerance=25%, Case/Package=0402, Core Material=Ferrite, Depth=0.55mm, Height=0.5mm, Impedance=120R, Lead Free="Lead Free", Length=1mm, Material=Steel, Max Current Rating=550mA, Max DC Current=500mA, Military Standard=Not, Number of Circuits=1, Number of Lines=1, Number of Pins=2, Packaging="Tape and Reel", Radiation Hardening=No, REACH SVHC="No SVHC", Shielding=Unshielded, Termination=SMD/SMT, Test Frequency=100MHz, Width=0.5mm
P102: library part CMP-03369-000061-1, "CONN HEADER R/A 3POS 2MM", Current Rating=3A, Manufacturer="TE Connectivity", Temperature="-25°C to +85°C", Temperature Range High=+85°C, Temperature Range Low=-25°C, Voltage Rating=250V, Automotive=No, Category=Conn, ComponentLink2Description=Datasheet, ComponentLink2URL=https://www.te.com/usa-en/product-440055-3.datasheet.pdf, Conn Gender=Male, Conn Orientation="Right Angle", Contact Material=Tin, Device Class L1=Connectors, Device Class L2="Headers and Wire Housings", Device Class L3=unset, Digikey Description="CONN HEADER R/A 3POS 2MM", Footprint Url=https://www.te.com/commerce/DocumentDelivery/DDEController?Action=showdoc&DocId=Customer+Drawing%7F440055%7FB4%7Fpdf%7FEnglish%7FENG_CD_440055_B4.pdf%7F440055-3, Height=5.25mm, Lead Free=Yes, Manufacturer Part Number=440055-3, Mouser Description="Headers & Wire Housings 3 POS HDR R/A 2.0mm", Number Of Contacts=3, Number Of Rows=1, Octopart=https://octopart.com/440055-3-te+connectivity-40644627, Package=440055-3, Pitch=2mm, RoHS=TRUE
R101 R102 R103 R104 R105 R106 R301: library part RES_0402
R201 R202: library part RES_0603
R203 R204 R205: library part RES_1206
U102: "ams AS5247U Magnetic Rotary Position Sensor", ComponentLink1Description="New link", ComponentLink2Description="New link 1"
U103: "Integrated Circuit", Manufacturer_Name="Texas Instruments", Mouser Part Number=595-TCAN337GDR, Arrow Part Number=TCAN337GDR, Arrow Price/Stock=https://www.arrow.com/en/products/tcan337gdr/texas-instruments?region=nac, Datasheet Link=http://www.ti.com/lit/gpn/tcan337g, Height=1.75mm, Manufacturer_Part_Number=TCAN337GDR, Mouser Price/Stock=https://www.mouser.co.uk/ProductDetail/Texas-Instruments/TCAN337GDR?qs=gMfM3zrbS4qJ%252BEWbPaeUtA%3D%3D
U104: "Integrated Circuit", Arrow Part Number=ADC121C021CIMK/NOPB, Manufacturer_Name="Texas Instruments", Mouser Part Number=926-AD121C021CIMKNPB, Arrow Price/Stock=https://www.arrow.com/en/products/adc121c021cimknopb/texas-instruments, Datasheet Link=http://www.ti.com/lit/ds/symlink/adc121c021.pdf, Height=1.1mm, Manufacturer_Part_Number=ADC121C021CIMK/NOPB, Mouser Price/Stock=https://www.mouser.co.uk/ProductDetail/Texas-Instruments/ADC121C021CIMK-NOPB?qs=7X5t%252BdzoRHCpyBc1ZtMoSA%3D%3D
U202 U203 U204: "Integrated Circuit", Manufacturer_Name="Texas Instruments", Mouser Part Number=595-INA240A4EDRQ1, Arrow Part Number=INA240A4EDRQ1, Arrow Price/Stock=https://www.arrow.com/en/products/ina240a4edrq1/texas-instruments, Datasheet Link=http://www.ti.com/lit/ds/symlink/ina240-q1.pdf, Height=1.75mm, Manufacturer_Part_Number=INA240A4EDRQ1, Mouser Price/Stock=https://www.mouser.co.uk/ProductDetail/Texas-Instruments/INA240A4EDRQ1?qs=yBt6ao%2FxsTymmpZKpOwKvQ%3D%3D
U301: "Integrated Circuit", Arrow Part Number=MCP1792-3302H/DB, Manufacturer_Name=Microchip, Mouser Part Number=579-MCP1792-3302HDB, Arrow Price/Stock=https://www.arrow.com/en/products/mcp1792-3302hdb/microchip-technology, Datasheet Link=http://ww1.microchip.com/downloads/en/DeviceDoc/MCP1792-Family-Data-Sheet-DS20006229C.pdf, Height=1.8mm, Manufacturer_Part_Number=MCP1792-3302H/DB, Mouser Price/Stock=https://www.mouser.co.uk/ProductDetail/Microchip-Technology/MCP1792-3302H-DB?qs=mAH9sUMRCttoG5iLrM6fSg%3D%3D
?: "Connector", Manufacturer_Name=Amass, Datasheet Link=https://www.tme.eu/sl/Document/ce4077e36b79046da520ca73227e15de/XT30PW%20SPEC.pdf, Height=5mm, Manufacturer_Part_Number=XT30PW-M

## Via types
v1: diameter 0.8, hole 0.4, L1 [Signal] to L4 [Signal], tented both sides, 156 vias
v2: diameter 0.6, hole 0.3, L1 [Signal] to L4 [Signal], tented both sides, 84 vias
v3: diameter 0.6, hole 0.25, L1 [Signal] to L4 [Signal], tented both sides, 1 vias

## Nets (pads, with @x,y where several pads share a name; then routed paths per layer and width w, separated by ;. In a path a pad name is that pad's centre, name@x,y a point inside that pad or via, vN(x,y) a via of type N, cw(c..) or ccw(c..) an arc to the next point about the centre after c; other vN are vias at no path point)
+3V3: C102.2 C103.2 C104.2 C105.1 C106.2 C107.2 C302.2 D301.1 FB101.1 J101.5 R101.1 R201.2 R202.2 U101.1 U101.17 U102.20 U102.22 U103.3 U301.3 | length 176.3
  L1 [Signal] w0.4: -21.45,-11.425 -21.3,-11.275 J101.5 ; D301.1 -16.975,22.075 ; 10.925,23.475 11.6,23.475 FB101.1
  L1 [Signal] w0.5: U101.17 -4.268,-7.679 -4.268,-6.282 C107.2 ; v1(-2,-23) -0.75,-21.75 R101.1 ; 10.4,23.475 10.925,23.475
  L1 [Signal] w0.6: -21.45,-2.375 v1(-15.775,-2.375) ; v1(-12.975,-3.675) -12.975,-3.661 -12.14,-2.826 -12.14,-2.35 -12.09,-2.3 U103.3 -12.09,1.185 -11.65,1.625 -6.475,1.625 -5.425,0.575 R202.2 R201.2 -5.425,-5.1 -4.26,-6.265 C107.2 ; v1(-9.9,-22.8) -9.888,-22.787 -9.888,-18.912 C105.1 -9.875,-17.765 -9.88,-17.76 C106.2 -9.88,-17.74 -9.875,-17.735 U101.1 ; 9.55,23.475 10.4,23.475
  L1 [Signal] w0.8: v1(-9.9,-22.8) -14.55,-22.8 -21.35,-16 -21.35,-11.275 -21.35,-2.547 -21.45,-2.447 -21.45,-2.375 -21.45,18.05 -17.425,22.075 -16.975,22.075 -11.075,22.075 C302.2 ; U301.3 -10.581,20.35 -11.05,20.819 C302.2 ; 9.55,23.475 8.175,22.1 C302.2
  L4 [Signal] w0.3: U102.22 4.8,-1.2 ; U102.20 4.9,0.4 ; C103.2@5.705,-1.415 C103.2
  L4 [Signal] w0.35: 4.8,-1.2 5.1,-1.2 ; 4.9,0.4 5.2,0.4
  L4 [Signal] w0.45: 5.1,-1.2 5.49,-1.2 5.705,-1.415 C103.2@5.79,-1.33 ; 5.2,0.4 C104.2@5.69,0.4 ; C104.2@5.74,0.425 5.755,0.44 5.765,0.44 5.84,0.515 C104.2@5.84,0.525
  L4 [Signal] w0.6: v1(-15.775,-2.375) -14.475,-3.675 v1@-13.029,-3.675 ; v1(-12.975,-3.675) -12.975,-1.844 -4.331,6.8 4.839,6.8 5.79,5.849 C104.2 C103.2@5.79,-1.33
  L4 [Signal] w0.8: v1(-9.9,-22.8) -9.3,-23.4 -2.4,-23.4 v1(-2,-23)
A_IN+: Q201.1 Q204.3 R203.1 U201.6 U202.8 | length 14.2
  L1 [Signal] w0.24: U201.6@4.925,-5.975 5.585,-5.975 6.26,-5.3 9.2,-5.3 11.055,-7.155 13.6,-7.155
  L1 [Signal] w0.4: U202.8 19.505,-7.405 20,-7.9 20,-8.866 19.766,-9.1 19.55,-9.1 19.15,-9.5 R203.1
A_IN-: A.1 R203.2 U202.1 | length 5
  L1 [Signal] w0.4: R203.2@22,-9.85 R203.2 22.05,-9.5 21.65,-9.1 21.434,-9.1 21.2,-8.866 21.2,-7.9 21.695,-7.405 U202.1
ADC_INT: U101.8 U104.4 | length 4.6
  L1 [Signal] w0.3: U101.8 -2.563,-16.163 -1.275,-14.875 U104.4
AS5247_MOSI: U101.28 U102.6 | length 19.6
  L1 [Signal] w0.3: v2(-14.13,-10.325) -12.93,-11.525 U101.28
  L4 [Signal] w0.3: v2(-14.13,-10.325) -14.13,-7.63 -5.3,1.2 U102.6
AS5247_SCK: U101.26 U102.2 | length 13.4
  L1 [Signal] w0.3: v2(-11.975,-7.925) -12.575,-8.525 -12.575,-9.325 -12.125,-9.775 -11.463,-9.775 U101.26
  L4 [Signal] w0.3: v2(-11.975,-7.925) -6.05,-2 U102.2
AS5247_T_MISO: U101.27 U102.4 | length 16.6
  L1 [Signal] w0.3: v2(-13.3,-8.525) -13.3,-10.075 -12.65,-10.725 U101.27
  L4 [Signal] w0.3: v2(-13.3,-8.525) -13.286,-8.511 -13.286,-7.986 -5.7,-0.4 U102.4
AS5247_T_NCS: U101.29 U102.32 | length 18
  L1 [Signal] w0.3: v2(-14.375,-11.75) -13.8,-12.325 U101.29
  L4 [Signal] w0.3: v2(-14.375,-11.75) -6.825,-4.2 U102.32
B_IN+: Q202.1 Q205.3 R204.1 U201.11 U203.8 | length 19.1
  L1 [Signal] w0.24: U201.11 3.365,-3.56 6.925,0 13.809,0 13.95,-0.141 Q205.3@13.95,-1.9
  L1 [Signal] w0.4: U203.8 18.123,6.01 19.09,6.01 20.209,4.891 20.209,4.559 19.975,4.325 19.675,4.325 19.275,3.925 R204.1
B_IN-: B.1 R204.2 U203.1 | length 4.4
  L1 [Signal] w0.4: R204.2 22.175,3.925 21.775,4.325 21.525,4.325 21.291,4.559 21.291,4.891 22.41,6.01 23.377,6.01 U203.1
C_IN+: Q203.1 Q206.3 R205.1 U201.14 U204.8 | length 27.9
  L1 [Signal] w0.24: U201.14 1.865,-2.46 2.175,-2.15 2.175,2.475 7.6,7.9 13.3,7.9 13.496,8.096 13.496,9.046 Q206.3@13.95,9.5
  L1 [Signal] w0.4: U204.8 15.751,16.195 15.986,15.961 15.986,14.036 15.75,13.8 15.45,13.8 15.05,13.4 R205.1
C_IN-: C.1 R205.2 U204.1 | length 5.3
  L1 [Signal] w0.4: R205.2 17.95,13.4 17.55,13.8 17.434,13.8 17.2,14.034 17.2,15.961 17.434,16.195 U204.1
CAN_N: P102.2 R102.1 U103.6 | length 12.1
  L1 [Signal] w0.381: P102.2 -17.716,11.618 -15.727,11.618 -15.679,11.666 -15.51,11.666 R102.1 -15.391,11.666 -15.222,11.666 -15.174,11.618 -14.546,11.618 -12.408,9.479 -12.408,5.542 -12.09,5.224 U103.6
CAN_P: P102.3 R102.2 U103.7 | length 11
  L1 [Signal] w0.381: P102.3 -17.716,10.983 -15.727,10.983 -15.679,10.935 -15.51,10.935 R102.2 -15.391,10.935 -15.222,10.935 -15.174,10.983 -14.81,10.983 -13.043,9.216 -13.043,5.542 -13.36,5.224 U103.7
CPH: C203.2 U201.1 | length 1.5
  L1 [Signal] w0.24: U201.1@4.925,-8.475 5.105,-8.475 5.325,-8.695 5.325,-8.725
  L1 [Signal] w0.3: 5.325,-8.725 5.407,-8.807 5.407,-8.843 5.393,-8.857
  L1 [Signal] w0.4: 5.393,-8.857 5.425,-8.89 5.425,-8.933 5.85,-9.358 C203.2
CPL: C203.1 U201.32 | length 1.5
  L1 [Signal] w0.24: U201.32 4.365,-9.305 4.505,-9.305 4.6,-9.4
  L1 [Signal] w0.3: 4.6,-9.4 4.7,-9.5
  L1 [Signal] w0.4: 4.7,-9.5 4.7,-9.509 5.2,-10.009 C203.1
Current_A: U101.5 U202.5 | length 44
  L1 [Signal] w0.5: U101.5 -6.625,-16.213 -6.625,-17.7 -4.9,-19.425 v2(3.375,-19.425) ; U202.5 18.09,-3.597 20.897,-3.597 v2(20.9,-3.6)
  L4 [Signal] w0.5: v2(3.375,-19.425) 13.275,-19.425 20.9,-11.8 v2(20.9,-3.6)
Current_B: U101.7 U203.5 | length 51.9
  L1 [Signal] w0.5: U101.7 -5.025,-16.213 -5.025,-17.016 -4.516,-17.526 -3.616,-18.425 v2(2.075,-18.425) ; U203.5 18.04,9.903 19.797,9.903 v3(19.8,9.9)
  L4 [Signal] w0.5: v2(2.075,-18.425) 2.8,-17.7 12.925,-17.7 19.6,-11.025 19.6,9.686 19.8,9.886 v3(19.8,9.9)
Current_C: R103.1 U204.5 | length 50
  L1 [Signal] w0.5: R103.1@5.15,-16 6.486,-16 6.511,-16.025 v2(6.525,-16.025) ; U204.5 15.481,20.005 15.611,19.875 v2(15.625,19.875)
  L4 [Signal] w0.5: v2(6.525,-16.025) 12.575,-16.025 18.5,-10.1 18.5,18.925 17.55,19.875 v2(15.625,19.875)
DEBUG_LED: D101.1 U101.6 | length 12
  L1 [Signal] w0.3: D101.1 v2(-11.15,-21) ; U101.6 -5.875,-17.25 v2(-4.525,-18.6)
  L4 [Signal] w0.3: v2(-11.15,-21) -6.925,-21 v2(-4.525,-18.6)
DRV_ENABLE: U101.13 U201.22 U201.24 U201.26 U201.28 | length 17
  L1 [Signal] w0.24: U101.13 -1.422,-11.525 -1.072,-11.875 v2(-0.975,-11.875) ; U201.24 -0.309,-8.475 -0.625,-8.791 -0.625,-9.5 ; U201.22 -1.425,-7.475 -1.775,-7.825 -1.775,-8.35 -0.625,-9.5 ; U201.26 1.365,-9.305 1.255,-9.415 1.255,-9.595 v2(0.575,-10.275) ; U201.28 2.365,-10.661 2.026,-11 1.3,-11 v2(0.575,-10.275) ; -0.625,-9.5 0.111,-10.236 0.536,-10.236 v2(0.575,-10.275)
  L4 [Signal] w0.24: v2(-0.975,-11.875) -0.975,-11.825 v2(0.575,-10.275)
DRV_FAULT: R202.1 U101.31 U201.17 | length 34.8
  L1 [Signal] w0.24: v2(-14.125,-13.575) -14.028,-13.575 -13.678,-13.925 U101.31 ; v2(-6.2,2.925) -4.155,0.88 -4.155,-1.466 R202.1 -3.825,-1.846 -0.696,-4.975 U201.17
  L4 [Signal] w0.24: v2(-14.125,-13.575) -14.125,-13.528 -15.35,-12.303 -15.35,-7.525 -6.2,1.625 v2(-6.2,2.925)
DRV_MISO: R201.1 U101.11 U201.18 | length 22.5
  L1 [Signal] w0.24: v2(-9.075,-10.175) -9.006,-10.244 -8.431,-10.244 -5.55,-13.125 U101.11 ; v2(-3.825,-4.975) R201.1 -2.925,-3.6 -1.05,-5.475 U201.18
  L4 [Signal] w0.24: v2(-9.075,-10.175) -9.075,-10.078 -9.25,-9.903 -9.25,-8.125 -6.1,-4.975 v2(-3.825,-4.975)
DRV_MOSI: U101.12 U201.19 | length 17.7
  L1 [Signal] w0.24: v2(-8.478,-9.347) -5.5,-12.325 U101.12 ; v2(-2.225,-5.614) -2.159,-5.68 -1.565,-5.68 -1.27,-5.975 U201.19
  L4 [Signal] w0.24: v2(-8.478,-9.347) -8.478,-8.653 -5.37,-5.545 -2.294,-5.545 v2(-2.225,-5.614)
DRV_NSC: U101.9 U201.21 | length 17.1
  L1 [Signal] w0.24: v2(-7.45,-12.975) -5.7,-14.725 U101.9 ; v2(-2.225,-7.325) -1.875,-6.975 U201.21
  L4 [Signal] w0.24: v2(-7.45,-12.975) -7.519,-12.906 -7.519,-12.661 -7.525,-12.654 -7.525,-10.45 -5.122,-8.047 -2.849,-8.047 -2.225,-7.422 v2(-2.225,-7.325)
DRV_PWM_A: U101.20 U201.23 | length 10.5
  L1 [Signal] w0.24: U101.20 -6.638,-7.724 -6.638,-10.337 v2(-6.6,-10.375) ; v2(-0.95,-8.175) -0.853,-8.175 -0.653,-7.975 U201.23
  L4 [Signal] w0.24: v2(-6.6,-10.375) -4.875,-8.65 -1.425,-8.65 v2(-0.95,-8.175)
DRV_PWM_B: U101.19 U201.25 | length 9.8
  L1 [Signal] w0.24: U101.19 -5.875,-9.953 -5.55,-10.278 v2(-5.55,-10.375) ; v2(0.125,-9.3) 0.194,-9.231 0.865,-9.231 U201.25
  L4 [Signal] w0.24: v2(-5.55,-10.375) -4.475,-9.3 v2(0.125,-9.3)
DRV_PWM_C: U101.18 U201.27 | length 14.2
  L1 [Signal] w0.24: v2(-5.425,-11.3) -5.356,-11.231 -4.972,-11.231 -4.831,-11.091 -4.831,-9.794 -5.075,-9.55 U101.18 ; v2(1.575,-10.275) 1.575,-10.178 1.865,-9.888 U201.27
  L4 [Signal] w0.24: v2(-5.425,-11.3) -4.075,-12.65 -0.425,-12.65 1.536,-10.689 1.536,-10.314 v2(1.575,-10.275)
DRV_SCK: U101.10 U201.20 | length 18.4
  L1 [Signal] w0.24: v2(-8.65,-11.725) -7.75,-11.725 -5.55,-13.925 U101.10 ; v2(-2.225,-6.475) U201.20
  L4 [Signal] w0.24: v2(-8.65,-11.725) -8.25,-11.325 -8.25,-10.2 -4.525,-6.475 v2(-2.225,-6.475)
DVDD: C205.2 U201.29 | length 1.1
  L1 [Signal] w0.24: U201.29 2.865,-10.03 C205.2
FDCAN1_RX: U101.21 U103.4 | length 8.4
  L1 [Signal] w0.3: U103.4 -10.82,-2.63 -7.475,-5.975 U101.21
FDCAN1_TX: U101.22 U103.1 | length 11.5
  L1 [Signal] w0.3: U103.1 -14.475,-0.792 -14.475,-3.3 -13.35,-4.425 -10.275,-4.425 -8.425,-6.275 -8.425,-7.537 U101.22
GHA: Q201.2 U201.5 | length 11.2
  L1 [Signal] w0.24: U201.5@4.925,-6.475 5.725,-6.475 6.2,-6 8.9,-6 10.7,-7.8 14.035,-7.8 14.76,-8.525 Q201.2
GHB: Q202.2 U201.12 | length 18.6
  L1 [Signal] w0.24: U201.12 2.865,-3.26 4.22,-1.905 4.22,1.807 6.213,3.8 13.835,3.8 14.76,2.875 Q202.2
GHC: Q203.2 U201.13 | length 21
  L1 [Signal] w0.24: U201.13 2.365,-3.035 3.175,-2.225 3.175,2.175 8.4,7.4 14.035,7.4 14.76,6.675 Q203.2
GLA: Q204.2 U201.7 | length 8.5
  L1 [Signal] w0.24: U201.7@4.925,-5.475 5.325,-5.475 6.3,-4.5 9.3,-4.5 11.393,-6.593 12.018,-6.593 Q204.2
GLB: Q205.2 U201.10 | length 9.1
  L1 [Signal] w0.24: U201.10 3.865,-3.835 4.825,-2.875 Q205.2
GLC: Q206.2 U201.15 | length 20.9
  L1 [Signal] w0.24: U201.15 1.365,-3.358 0.775,-2.768 0.775,2.575 6.725,8.525 Q206.2
GND: ?.2 C101.2 C102.1 C103.1 C104.1 C105.2 C106.1 C107.1 C108.1 C109.1 C110.1 C111.1 C112.1 C113.1 C202.1 C204.2 C205.1 C206.1 C207.1 C208.1 C301.1 C302.1 C303.1 C304.1 C305.1 C306.1 C307.1 C308.1 C309.1 C310.1 C311.1 C312.1 C313.1 C314.1 C315.1 C316.1 C317.1 C318.1 J101.6 J101.SH1 J101.SH2 P102.1 Q204.1 Q205.1 Q206.1 R106.2 R301.2 U101.14 U101.16 U101.32 U102.7 U102.8 U102.23 U102.24 U102.27 U102.28 U102.29 U102.30 U102.33 U103.2 U103.8 U104.2 U201.8 U201.9 U201.16 U201.30 U201.33 U202.2 U202.7 U203.2 U203.7 U204.2 U204.7 U301.2 U301.4 Y101.2 Y101.4 | length 119.5
  L1 [Signal] w0.24: U201.16 0.865,-4.64 1.01,-4.785 1.01,-5.21 v2(1.225,-5.425) ; U201.30 3.365,-8.33 3.67,-8.025 v2(3.825,-8.025) ; v2(3.825,-5.425) 3.915,-5.425 4.365,-4.975 ; U201.9 4.365,-4.975 ; U201.8 4.765,-4.975 4.365,-4.975
  L1 [Signal] w0.4: v2(-7.4,-19.2) -7.4,-19.25 -6.21,-20.44 C113.1
  L1 [Signal] w0.5: R301.2@-16.975,17.4 -14.275,17.4 -13.65,18.025 U301.4 ; v2(-4.2,-10.7) -4.188,-10.712 -2.85,-10.712 U101.14 -1.43,-10.725 -1.31,-10.845 C110.1 ; C107.1 -3.29,-6.325 -3.29,-7.208 -3.225,-7.273 -3.225,-9.075 -3.175,-9.125 U101.16 ; U104.2 2.295,-15.805 3.805,-15.805 C108.1@3.812,-15.797 ; v2(3.8,-16.8) 3.812,-16.787 C108.1@3.812,-15.797 ; C108.1 C108.1@3.812,-15.797
  L1 [Signal] w0.6: J101.SH2 v2(-22.85,-13.7) ; v2(-22.85,-4.35) J101.SH1 ; v2(-19.75,-14.225) -19.75,-12.825 -19.7,-12.775 J101.6 ; v1(-15.5,-17.3) -15.462,-17.262 -14.764,-17.262 -14.602,-17.1 -13.7,-17.1 -11.751,-15.15 -11.751,-14.725 U101.32 ; v1(-14.675,6.35) -14.653,6.328 -14.653,4.809 U103.8 ; v1(-14.2,-18) -14.146,-18 -13.896,-17.75 C106.1 ; v2(-13.375,1.05) -13.36,1.035 U103.2 -13.36,-1.94 ccw(c-13.06,-1.94) -13.358,-1.97 -13.147,-2.291 cw(c-13.648,-2.622) -13.075,-2.442 -13.06,-2.49 C102.1 ; v2(-7.9,-22.2) -7.5,-22.6 -5.1,-22.6 Y101.4 ; Y101.2 -2.97,-21.3 -2.91,-21.36 C101.2 v2(-2.9,-22.2) ; C205.1 3.01,-11.085 4.96,-11.085 v2(5.15,-11.275) ; v2(10.45,22.3) C109.1 ; v1(10.675,17.75) 11.865,17.75 C208.1 ; C208.1@11.845,17.73 12.11,17.465 U204.7 ; v1(15.85,21.975) 15.865,21.99 17.115,21.99 C111.1 ; C207.1@16.55,7.58 C207.1@16.6,7.53 ; C206.1 16.6,-6.02 16.69,-6.11 18.063,-6.11 U202.7 v1(21.972,-6.135) U202.2 ; C207.1 16.6,7.59 16.66,7.53 17.435,7.53 17.6,7.365 U203.7 18.055,7.383 21.082,7.383 v1(21.1,7.4) ; U204.2 19.217,17.47 20.745,17.47 v1(20.75,17.475) ; v1@21.1,7.365 U203.2
  L1 [Signal] w0.7: v2(-12.3,23.5) C302.1 ; C202.1 8.05,-7.15 8.85,-7.15 v2(9.2,-7.5) 9.675,-7.975 9.675,-8.775 C307.1 C308.1 ; v1(8.325,5) C304.1 C303.1
  L4 [Signal] w0.24: U102.7 -4.148,1.948 U102.33@-1.948,1.948 ; U102.8 -2.8,2.8 U102.33@-1.948,1.948 ; v2(-1.5,-1.5) -1.2,-1.8 U102.30 ; v2(-1.5,1.5) U102.33@-1.948,1.948 ; U102.29 -0.4,-1.9 v2(0,-1.5) ; U102.28 0.4,-1.9 v2(0,-1.5) ; U102.27 1.2,-2.112 0.588,-1.5 v2(0,-1.5) ; v2(1.5,-1.5) U102.33@1.948,-1.948 ; U102.24 2.8,-2.8 U102.33@1.948,-1.948 ; U102.23 4.148,-1.948 U102.33@1.948,-1.948
  L4 [Signal] w0.6: C103.1 6.71,1.5 v1(8.525,1.5)
  L4 [Signal] w0.7: v2(-6.675,9.325) -6.65,9.35 C311.1 C309.1 C310.1 v2(-2.3,8.3) ; C312.1 C313.1 C314.1 ; v2(2.2,8.3) C314.1 ; v1(10.8,9.6) 10.773,9.6 10.523,9.35 C318.1 C316.1 C315.1 C317.1 C314.1
  other v1: -20.125,-23.6 -18.125,-23.6 -16.125,-23.6 -0.125,-23.6 1.875,-23.6 3.875,-23.6 5.875,-23.6 7.75,-23.6 9.75,-23.6 11.875,-23.6 13.875,-23.6 15.875,-23.6 17.875,-23.6 19.875,-23.6 -19.125,-21.6 0.875,-21.6 2.875,-21.6 4.875,-21.6 6.75,-21.6 8.75,-21.6 10.5,-21.6 13.875,-21.6 15.875,-21.6 17.875,-21.6 -23.75,-19.6 -20.125,-19.6 15.875,-19.6 17.875,-19.6 19.875,-19.6 -15.5,-18.8 -22,-18 17.875,-17.6 19.875,-17.6 22.1,-17.6 -23.75,-16.5 19.875,-15.6 -1.125,-13.6 4.875,-13.6 7,-11.5 -16.25,-9.325 10.5,-4 -20.125,-3.6 -16.75,-3.6 5.875,-3.6 7.875,-3.6 8.875,-1.6 10.7,-1.6 -23.25,-1.25 -18.125,0.4 -16.125,0.4 -19.125,2.4 -17.125,2.4 -15.125,2.4 -13.125,2.4 -18.125,4.4 -16.125,4.4 -8.125,4.4 -4.125,4.4 -2.3,5.5 0,5.5 2.175,5.5 -17.125,6.4 -9.125,6.4 -7.125,6.4 -16.125,8.4 -10.125,8.4 -8.125,8.4 -23.25,9.5 -20.125,9.5 -11.125,10.4 -9.125,10.4 -23.25,12.4 -20.125,12.4 -12.125,12.4 -10.125,12.4 -14.25,13.25 -5.125,14.4 4.875,14.4 6.875,14.4 8.875,14.4 10.875,14.4 12.875,14.4 -11.95,14.8 -12.775,15.65 -11.1,15.65 -23.25,15.75 -20.125,15.75 -16.125,16.4 -4.125,16.4 -2.125,16.4 -0.125,16.4 1.875,16.4 3.875,16.4 5.875,16.4 7.875,16.4 9.875,16.4 11.875,16.4 -11.95,16.5 -10.275,16.55 -11.1,17.4 -18.75,17.5 -5.125,18.4 -3.125,18.4 -1.125,18.4 0.875,18.4 2.875,18.4 4.875,18.4 6.875,18.4 8.875,18.4 -23.25,18.75 23.25,19 -16.125,20.4 -4.125,20.4 -2.125,20.4 -0.125,20.4 1.875,20.4 3.875,20.4 5.875,20.4 7.875,20.4 9.875,20.4 -13.5,20.75 -19.125,22.4 -16.125,23.5
  other v2: 1.225,-8.025 2.525,-8.025 -3.225,-7.3 1.225,-6.725 2.525,-6.725 3.825,-6.725 2.525,-5.425 -1.5,0 0,0 1.5,0 0,1.5 1.5,1.5
I2C_SCL: U101.25 U104.5 | length 15.8
  L1 [Signal] w0.3: U101.25 -11.289,-9.149 -10.301,-9.149 -9.75,-9.7 v2(-9.75,-11.05) ; v2(-2.025,-16.775) -2.025,-16.694 -1.162,-15.831 -0.231,-15.831 U104.5
  L4 [Signal] w0.3: v2(-9.75,-11.05) -9.75,-11.6 -4.575,-16.775 v2(-2.025,-16.775)
I2C_SDA: U101.30 U104.6 | length 14
  L1 [Signal] w0.3: U101.30 -11.276,-13.162 -9.513,-13.162 v2(-9.475,-13.2) ; v2(-0.5,-17.7) -0.5,-16.925 -0.35,-16.775 U104.6
  L4 [Signal] w0.3: v2(-9.475,-13.2) -9.418,-13.257 -9.418,-13.532 -5.25,-17.7 v2(-0.5,-17.7)
NetC108_2: C108.2 R103.2 U104.3 | length 2.9
  L1 [Signal] w0.5: U104.3 2.28,-14.87 3.82,-14.87 C108.2 3.842,-14.882 5.132,-14.882 R103.2@5.15,-14.9
NetD101_2: D101.2 R106.1 | length 1.1
  L1 [Signal] w0.4: R106.1 D101.2
NetD301_2: D301.2 R301.1 | length 1
  L1 [Signal] w0.4: R301.1@-16.975,18.5 D301.2
NRST: C101.1 J101.2 R101.2 U101.4 | length 31.5
  L1 [Signal] w0.3: J101.2 -19.237,-6.762 -17.187,-6.762 v2(-17.175,-6.75) ; U101.4 -7.488,-16.175 -7.488,-17.987 v2(-7.5,-18) -5.06,-20.44 C101.1 -2.88,-20.42 -1.62,-20.42 R101.2
  L4 [Signal] w0.3: v2(-17.175,-6.75) -18.727,-6.75 -19.975,-7.998 -19.975,-9.251 -11.226,-18 v2(-7.5,-18)
OSC_IN: C112.2 U101.2 Y101.1 | length 12.5
  L1 [Signal] w0.3: U101.2 -8.925,-16.313 -8.925,-22.775 -8.189,-23.511 -6.209,-23.511 C112.2 -4.401,-23.52 -4.225,-23.344 -4.225,-22.875 Y101.1
OSC_OUT: R105.1 U101.3 | length 4.7
  L1 [Signal] w0.3: U101.3 -8.275,-19.625 -7.45,-20.45 R105.1
OSC_R: C113.2 R105.2 Y101.3 | length 2.4
  L1 [Signal] w0.5: R105.2 -6.27,-21.3 -6.21,-21.36 C113.2 -6.17,-21.33 -5.08,-21.33 Y101.3
SWCLK: J101.4 U101.24 | length 27.4
  L1 [Signal] w0.3: J101.4 -17.601,-9.775 -17.425,-9.951 v2(-17.425,-13.225) ; v2(-15.4,-4.575) -15.35,-4.575 -12.826,-7.099 -10.025,-7.099 -9.875,-7.249 U101.24
  L4 [Signal] w0.3: v2(-17.425,-13.225) -18.275,-13.225 -21.1,-10.4 -21.1,-6.725 -18.95,-4.575 v2(-15.4,-4.575)
SWDIO: J101.3 U101.23 | length 13.5
  L1 [Signal] w0.3: J101.3 v2(-17.175,-8.275) ; v2(-14,-4.775) -13.025,-5.75 -10.225,-5.75 -9.225,-6.75 -9.225,-7.537 U101.23
  L4 [Signal] w0.3: v2(-17.175,-8.275) -14.057,-5.157 -14.057,-4.832 v2(-14,-4.775)
V_SUPPLY: ?.1 C201.1 C202.2 C301.2 C303.2 C304.2 C305.2 C306.2 C307.2 C308.2 C309.2 C310.2 C311.2 C312.2 C313.2 C314.2 C315.2 C316.2 C317.2 C318.2 Q201.3 Q202.3 Q203.3 U201.2 U201.3 U301.1 | length 10.9
  L1 [Signal] w0.24: U201.2@4.925,-7.975 5.725,-7.975 5.8,-7.9 ; U201.3@4.925,-7.475 5.659,-7.475 5.8,-7.616 5.8,-7.9 ; C201.1 6.47,-8.27 6.17,-8.27 5.8,-7.9
  L1 [Signal] w0.7: C201.1 C202.2 8.025,-10.625 8.7,-11.3 10.665,-11.3 11.075,-10.89 11.075,-10.22 C308.2@11.1,-10.22
  other v1: 12.5,-10.4 13.5,-10.4 12.5,-9.5 13.4,-9.5 12.5,-8.6 13.4,-8.6 12.6,1 13.5,1 12.6,1.9 13.5,1.9 12.6,2.8 13.5,2.8 12.6,4.8 13.5,4.8 12.6,5.7 13.5,5.7 12.6,6.6 13.5,6.6
  other v2: -8.275,14 -7.675,14.7 -8.575,14.8
VCP: C201.2 U201.4 | length 1.9
  L1 [Signal] w0.24: U201.4@4.925,-6.975 6.575,-6.975 C201.2
VDDA_FILTERED: C109.2 C110.2 C206.2 C207.2 C208.2 FB101.2 R104.1 U101.15 U104.1 U202.6 U203.6 U204.6 | length 76.8
  L1 [Signal] w0.4: FB101.2 12.4,22.31 C109.2
  L1 [Signal] w0.5: U101.15 C110.2 -1.25,-9.975 -1,-9.975 -0.83,-10.145 -0.824,-10.145 -0.59,-10.379 -0.59,-10.385 0.81,-11.785 2.56,-11.785 v2(3.425,-12.65) 3.415,-12.66 2.015,-12.66 0.975,-13.7 0.975,-16.482 1.268,-16.775 U104.1 ; C109.2 13.53,22.3 ; v2(16.425,17.375) 15.065,18.735 U204.6 13.785,18.738 11.877,18.738 C208.2 11.9,18.765 11.9,19.77 13.53,21.4 13.53,22.3 ; v2(16.5,-3.989) 16.51,-3.998 16.51,-4.89 16.56,-4.94 18.013,-4.94 U202.6 ; v2(16.55,9.636) 16.55,9.623 16.6,9.573 C207.2 16.622,8.613 18.015,8.613 U203.6 ; R104.1@16.925,23.1 15.45,23.1 14.65,22.3 13.53,22.3
  L4 [Signal] w0.5: v2(3.425,-12.65) 14.25,-12.65 16.5,-10.4 v2(16.5,-3.989) 16.5,9.573 16.55,9.623 v2(16.55,9.636) 16.54,9.646 16.54,17.246 16.425,17.361 v2(16.425,17.375)
VGLS: C204.1 U201.31 | length 1.1
  L1 [Signal] w0.24: U201.31 3.865,-10.005 C204.1
VREF+_FILTERED: C111.2 R104.2 U202.3 U203.3 U204.3 | length 43.3
  L1 [Signal] w0.5: v2(17.55,17.45) 17.55,18.578 17.393,18.735 ; v2@17.575,11.2 20.45,11.2 21.4,10.25 21.4,8.928 21.693,8.635 U203.3 ; v2(17.6,-2.15) 17.627,-2.15 17.977,-2.5 21.175,-2.5 21.725,-3.05 21.725,-4.557 22.018,-4.85 23.497,-4.85 U202.3 ; R104.2@18.025,23.1 18.03,23.095 18.03,22.005 C111.2 17.985,21.95 17.985,21.515 17.1,20.63 17.1,19.028 17.393,18.735 ; U204.3 17.393,18.735
  L4 [Signal] w0.5: v2@17.55,-2.15 17.562,-2.137 17.562,11.188 17.575,11.2 17.575,17.411 17.55,17.436 v2(17.55,17.45)
  other v2: 17.6,11.2
pads on no net: ?.3 ?.4 J101.1 MH1.MH MH2.MH MH3.MH MH4.MH U102.1 U102.3 U102.5 U102.9 U102.10 U102.11 U102.12 U102.13 U102.14 U102.15 U102.16 U102.17 U102.18 U102.19 U102.21 U102.25 U102.26 U102.31 U103.5 U202.4 U203.4 U204.4

## Polygon pours and split planes (outlines as drawn)
C_IN+ on L1 [Signal] "C_IN+_L01_P008" (solid, remove dead copper, pour order 8): 13.1,10.7 16,10.7 16,4.9 15.4,4.3 14.4,4.3 14.4,6.3 15.5,6.3 15.5,7 14.8,7.7 13.1,7.7
V_SUPPLY on L1 [Signal] "V_SUPPLY_L01_P010" (solid, remove dead copper, pour order 10): 13.9,7 10.6,7 10.6,4.4 13.9,4.4
V_SUPPLY on L1 [Signal] "V_SUPPLY_L01_P011" (solid, remove dead copper, pour order 11): 13.9,3.2 13.9,0.6 10.6,0.6 10.6,3.2
B_IN+ on L1 [Signal] "B_IN+_L01_P012" (solid, remove dead copper, pour order 12): 15.3,-3.1 15.9,-2.5 15.9,2.5 14.5,2.5 14.5,0.7 13.1,-0.7 13.1,-3.1
A_IN+ on L1 [Signal] "A_IN+_L01_P013" (solid, remove dead copper, pour order 13): 15.6,-4.5 16,-4.9 16,-10.2 15.3,-10.9 14.5,-10.9 14.5,-8.9 15.5,-8.9 15.5,-8 14.8,-7.3 13.1,-7.3 13.1,-4.5
V_SUPPLY on L1 [Signal] "V_SUPPLY_L01_P014" (solid, remove dead copper, pour order 14): 10.7,-8.2 13.9,-8.2 13.9,-10.8 10.7,-10.8
A_IN+ on L1 [Signal] "A_IN+_L01_P015" (solid, remove dead copper, pour order 15): 19.2,-8.9 19.2,-10.7 14.5,-10.7 14.5,-8.9
B_IN+ on L1 [Signal] "B_IN+_L01_P016" (solid, remove dead copper, pour order 16): 14.5,2.5 16.8,2.5 18.825,4.525 19.825,4.525 19.825,2.725 18.725,2.725 16.7,0.7 14.5,0.7
C_IN+ on L1 [Signal] "C_IN+_L01_P018" (solid, remove dead copper, pour order 18): 15.65,13.4 15.65,12.05 16,11.7 16,8.3 14.45,8.3 14.45,13.4
C_IN- on L1 [Signal] "C_IN-_L01_P019" (solid, remove dead copper, pour order 19): 23.35,12.05 24,12.7 24,15.2 23.25,15.95 20.95,15.95 19,14 17.35,14 17.35,12.05
B_IN- on L1 [Signal] "B_IN-_L01_P020" (solid, remove dead copper, pour order 20): 22.775,2.775 22.775,4.125 22.725,4.125 21.575,4.125 21.575,2.775 20.025,2.161 20.025,-0.7 20.944,-1.925 23,-1.925 24,-0.556 24,2.114
A_IN- on L1 [Signal] "A_IN-_L01_P021" (solid, remove dead copper, pour order 21): 22.622,-10.675 22.6,-10.653 22.6,-9.43 21.48,-9.43 21.48,-10.675 20.05,-11.857 20.05,-14.625 21.07,-15.9 22.97,-15.9 24,-14.613 24,-11.888
V_SUPPLY on L1 [Signal] "V_SUPPLY_L01_P022" (solid, remove dead copper, pour order 22): -8.175,16.3 -6.427,16.3 -6.427,15.148 -8.475,13.1 -9.775,13.1 -9.775,14.7
GND on L1 [Signal] "GND_L01_P023" (solid, remove dead copper, pour order 23): -10.275,13.2 -10.275,15.5 -8.275,17.5 -6.475,17.5 -6.475,18.6 -11.675,18.6 -12.775,19.7 -14.575,19.7 -14.575,16.4 -11.375,13.2
GND on L1 [Signal] "GND_L01_P029" (solid, remove dead copper, pour order 29): 11.8,-6.3 12.5,-6.3 12.5,-4.5 11.4,-3.4 9.8,-3.4 9.8,-4.3
GND on L1 [Signal] "GND_L01_P030" (solid, remove dead copper, pour order 30): 12.5,-0.7 12.5,-2.5 10.1,-2.5 10.1,-0.7
GND on L1 [Signal] "GND_L01_P031" (solid, pour order 31): 10,3.1 10,0.8 8,0.8 8,3.1
GND on L1 [Signal] "GND_L01_P032" (solid, pour order 32): 10.2,9.2 10.5,8.9 12.5,8.9 12.5,10.7 10.5,10.7 10.2,10.4
GND on L1 [Signal] "GND_L01_P036" (solid, remove dead copper, pour order 36): -18.6,-15.5 -15,-15.5 -12.1,-18.4 -10.9,-18.4 -10.9,-19.4 -13.3,-19.4 -14.3,-20.4 -14.9,-20.4 -15,-20.3 -18.6,-16.6
V_SUPPLY on L4 [Signal] "V_SUPPLY_L04_P000" (solid, pour order 0): -1.05,12 -1.05,14.5 -1.419,14.975 -3.475,14.975 -3.95,14.5 -3.95,12 -4.6,12 -6.1,13.5 -6.1,15.4 -6.6,15.9 -9.4,15.9 -10,15.3 -10,13.7 -6.5,10.2 11.4,10.2 11.4,-10.6 11.7,-10.9 14.4,-10.9 14.7,-10.6 14.7,10.8 13.5,12
GND on L3 [GND] "GND_L03_P035" (solid, pour order 35): -22,-24.475 22,-24.475 ccw(c22.025,-21.975) 24.525,-22 24.525,22 ccw(c22,22) 22,24.525 -22,24.525 ccw(c-22,22.05) -24.475,22.05 -24.475,-22 ccw(c-22,-22)
GND on L2 [GND] "SS" (solid, pour order 34): -22.075,-24.475 22,-24.475 ccw(c22,-21.95) 24.525,-21.95 24.525,22 ccw(c22,22) 22,24.525 -21.95,24.525 ccw(c-21.956,22.006) -24.475,22 -24.475,-21.95 ccw(c-22.013,-22.013)

## Silkscreen, mask and mechanical layers (free items; w line width, h text height)
Top Overlay:
  drawing of 22 lines, arcs and shapes, not listed
  text "REV 1.0" at -23.725,7.375 h1 r270
  text "Dennis S." at -20.475,7.3 h1 r270
Mechanical 1:
  the board outline again, w0.254